# Altium PCB HV_DAC_1PPM.PcbDoc (part 1 of 5)
Units mm, origin at the board's own origin, x right, y up, seen from the top; angles counter-clockwise.
Board outline 148 x 86 mm, 6 copper layers (Layer 1, Layer 2, Layer 3, Layer 4, Layer 5, Layer 6), stack 1.615 mm thick; 392 components, 227 nets, 1037 pads, 645 vias.
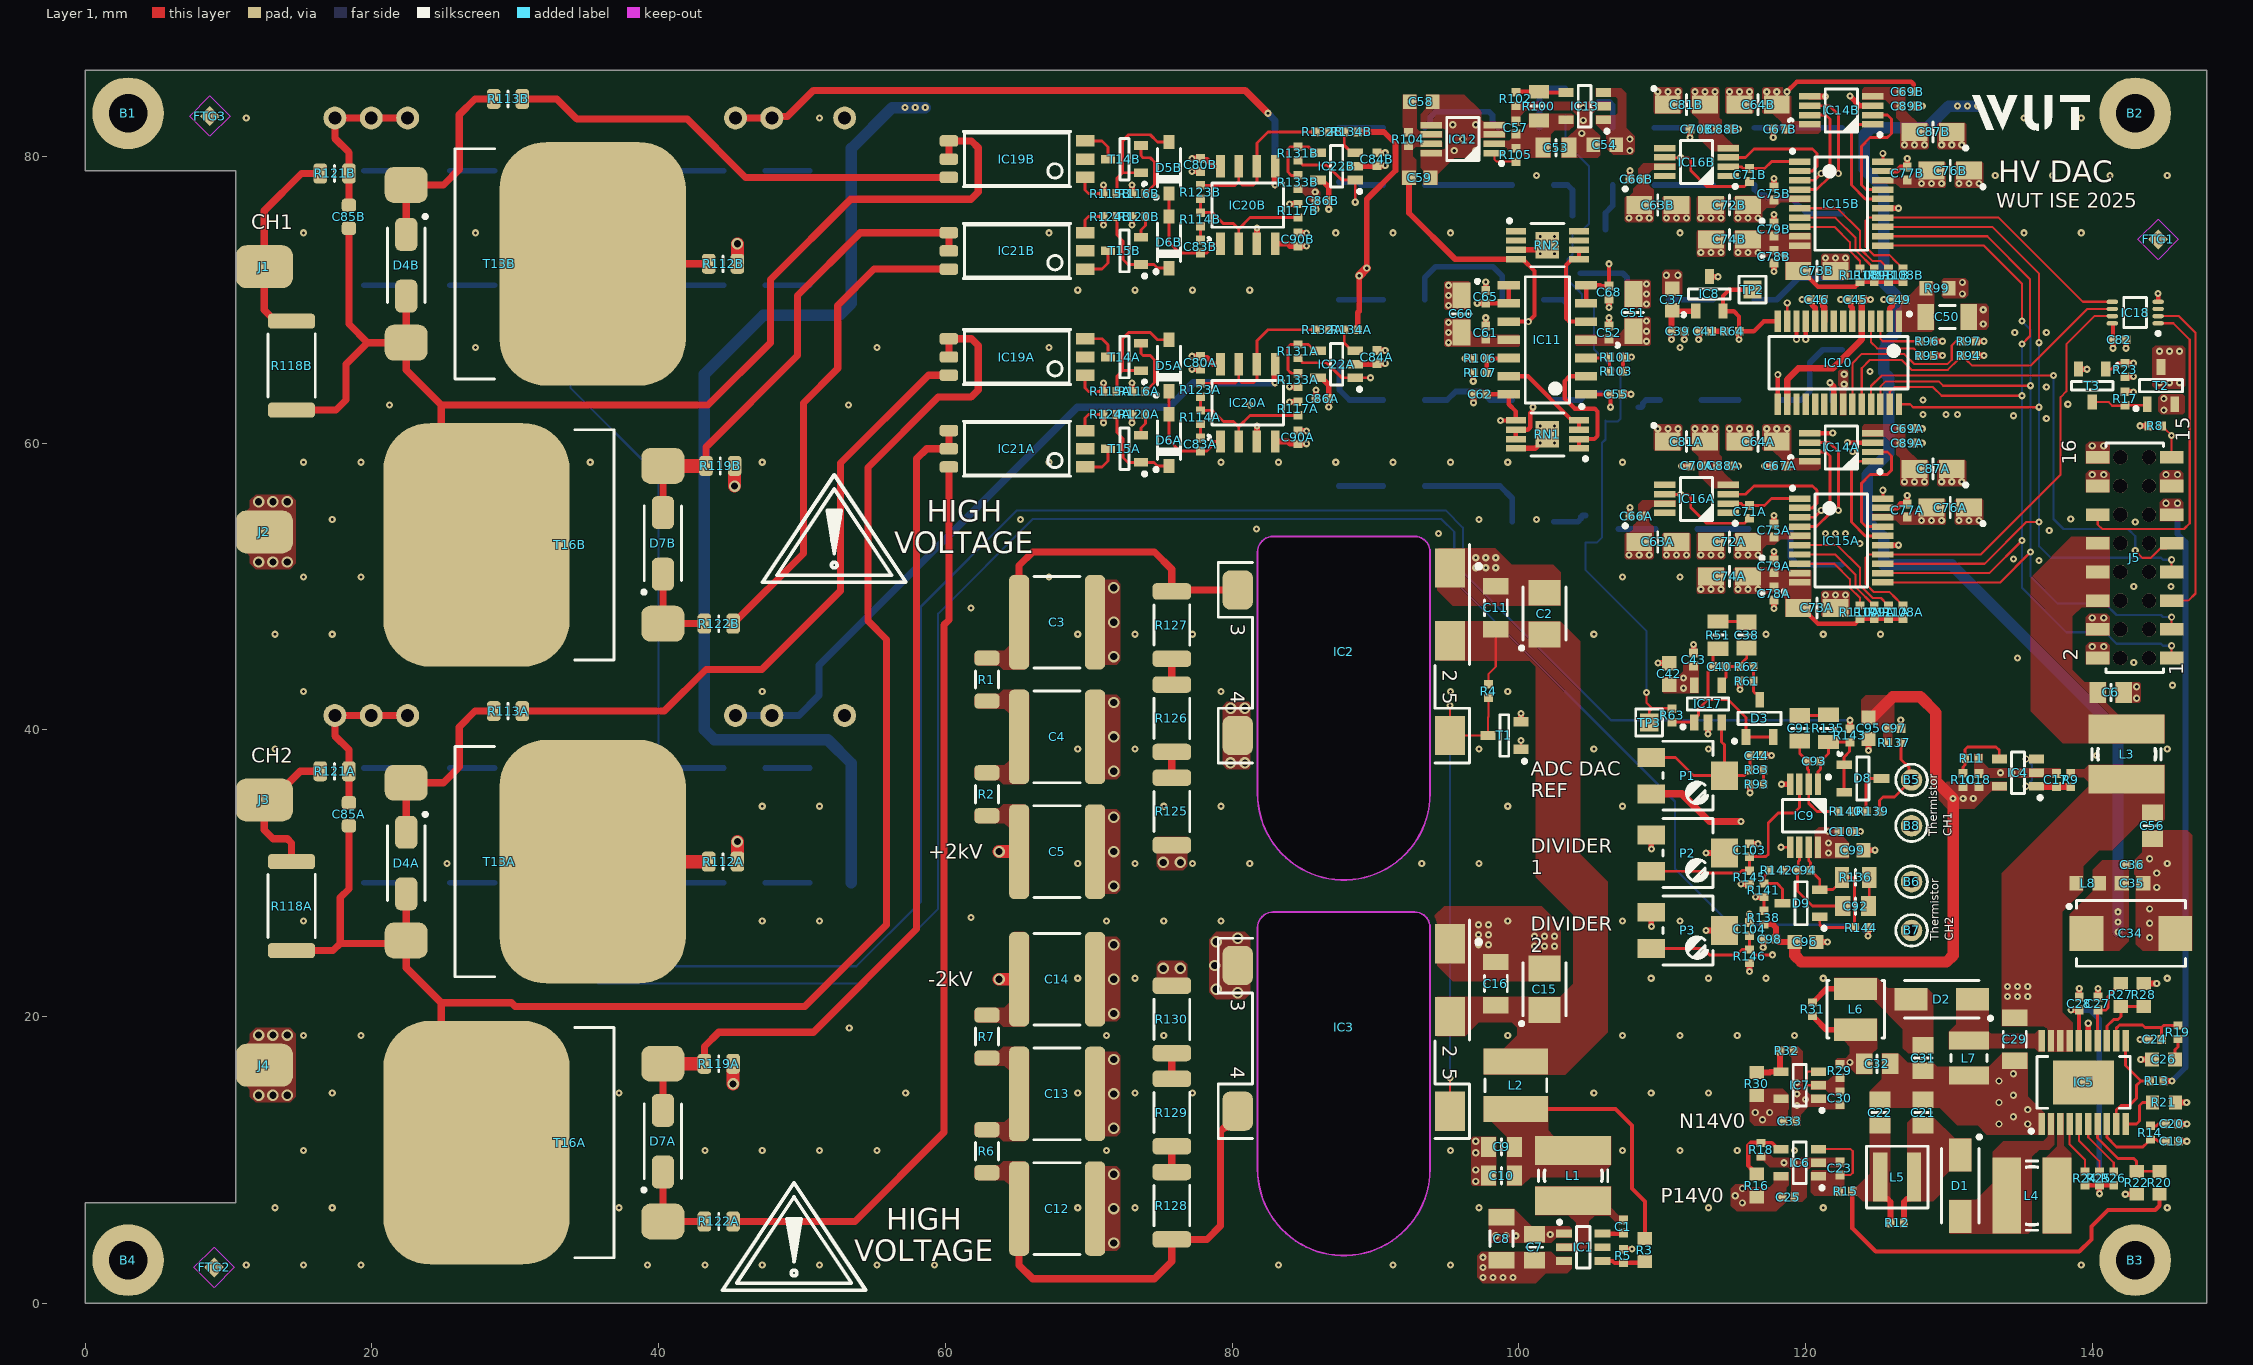
[diagram p0: Layer 1 view]
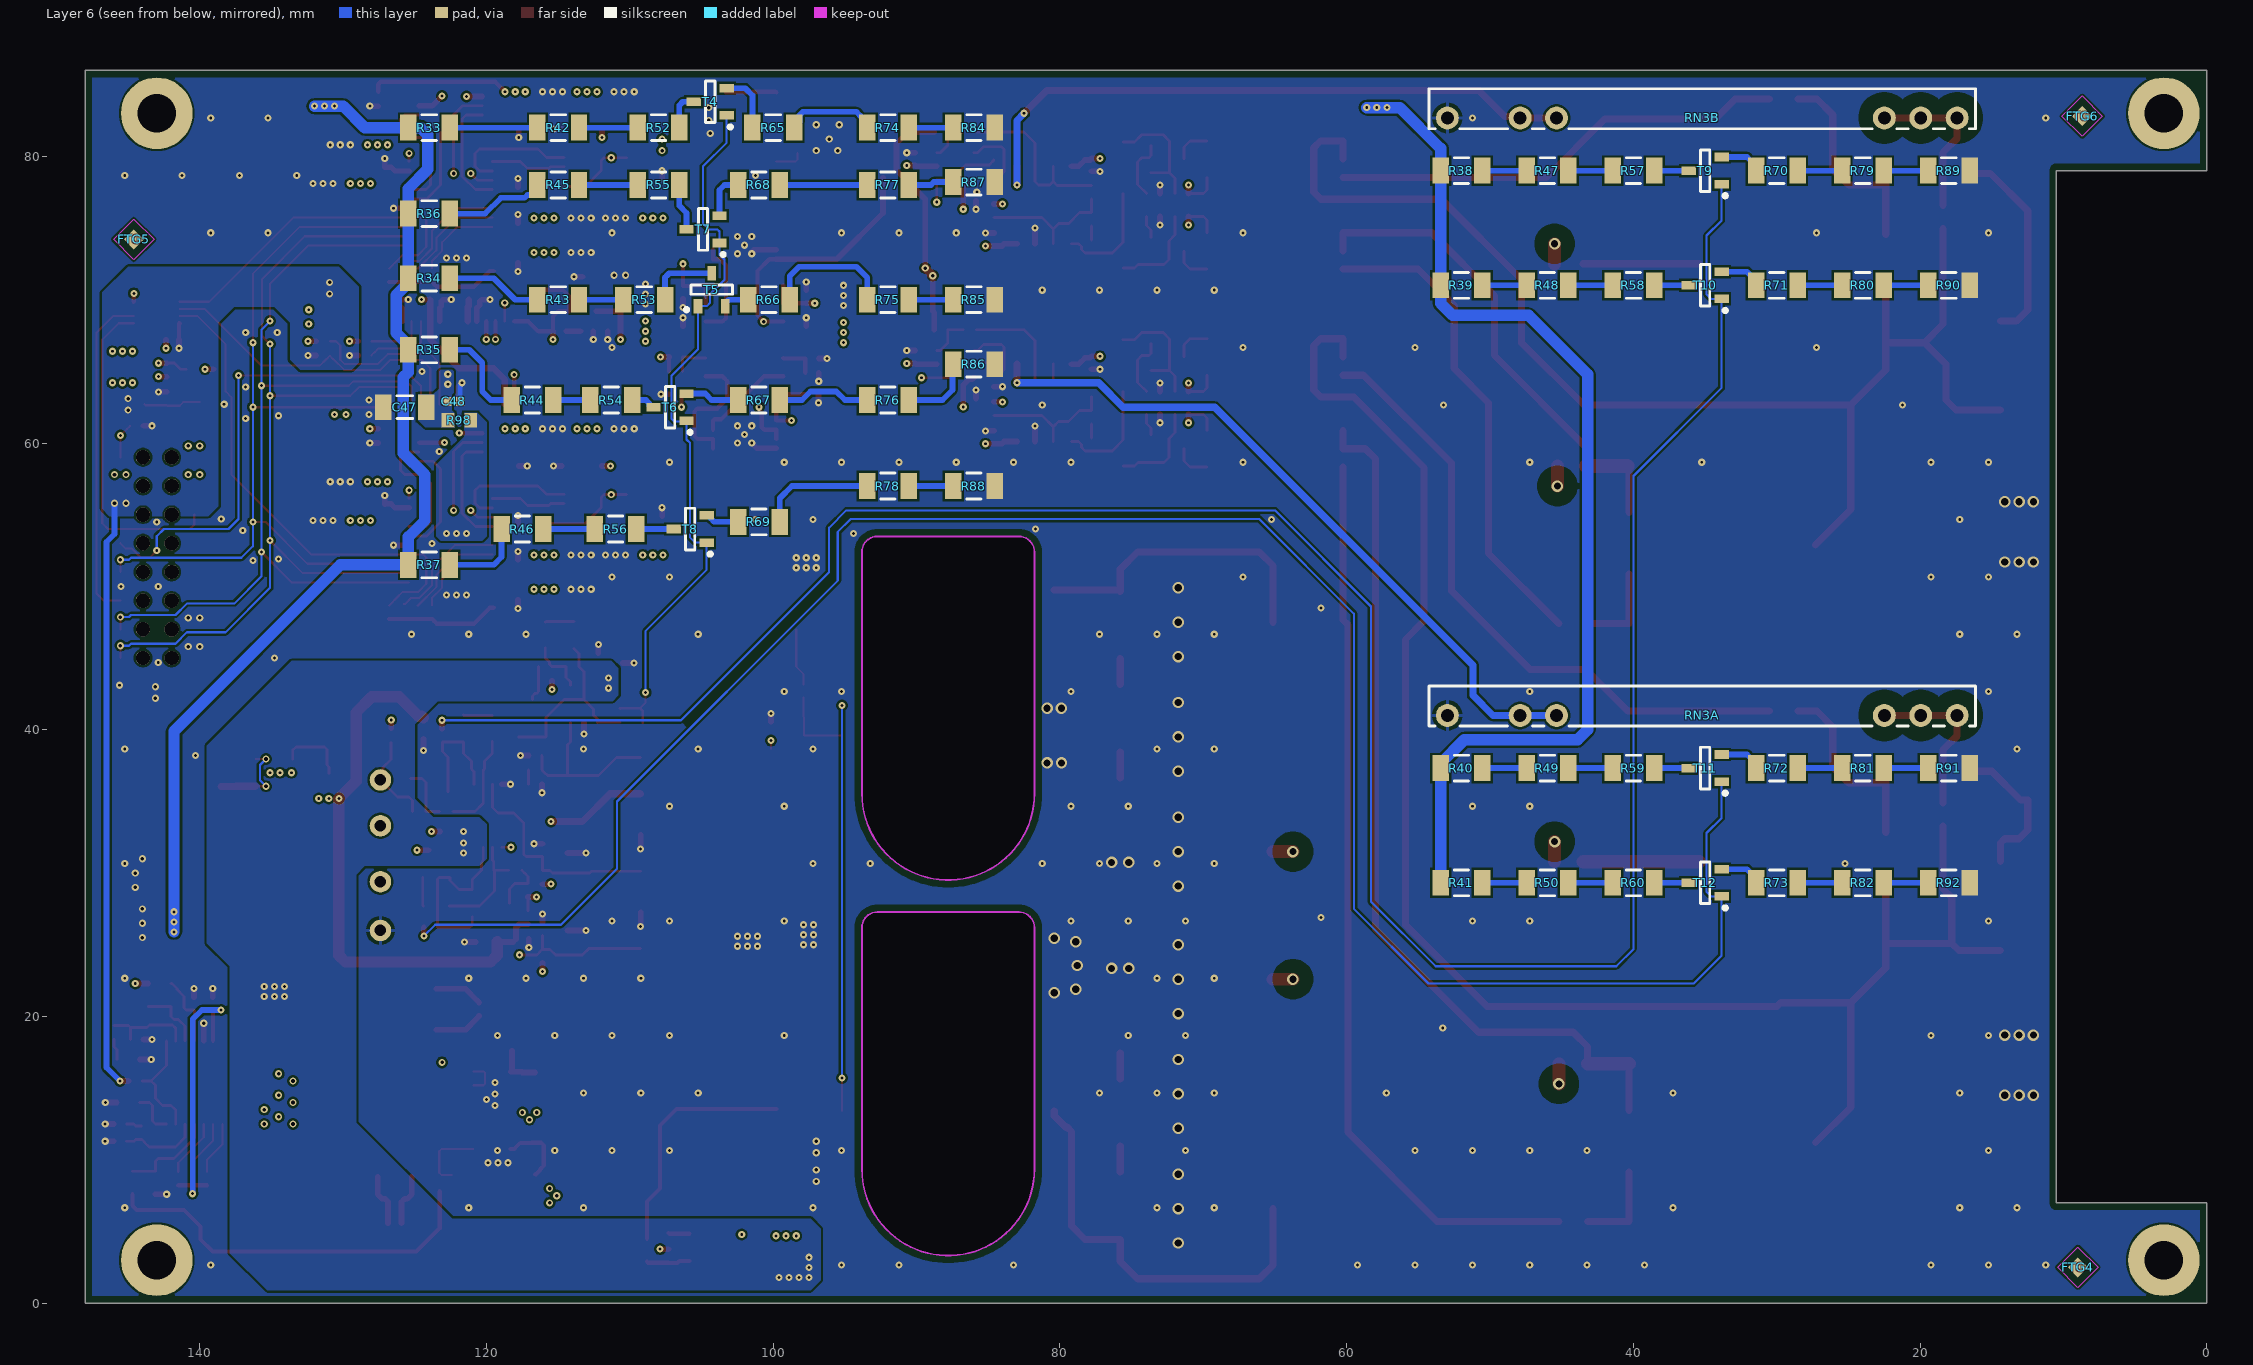
[diagram p1: Layer 6 view, seen from below]
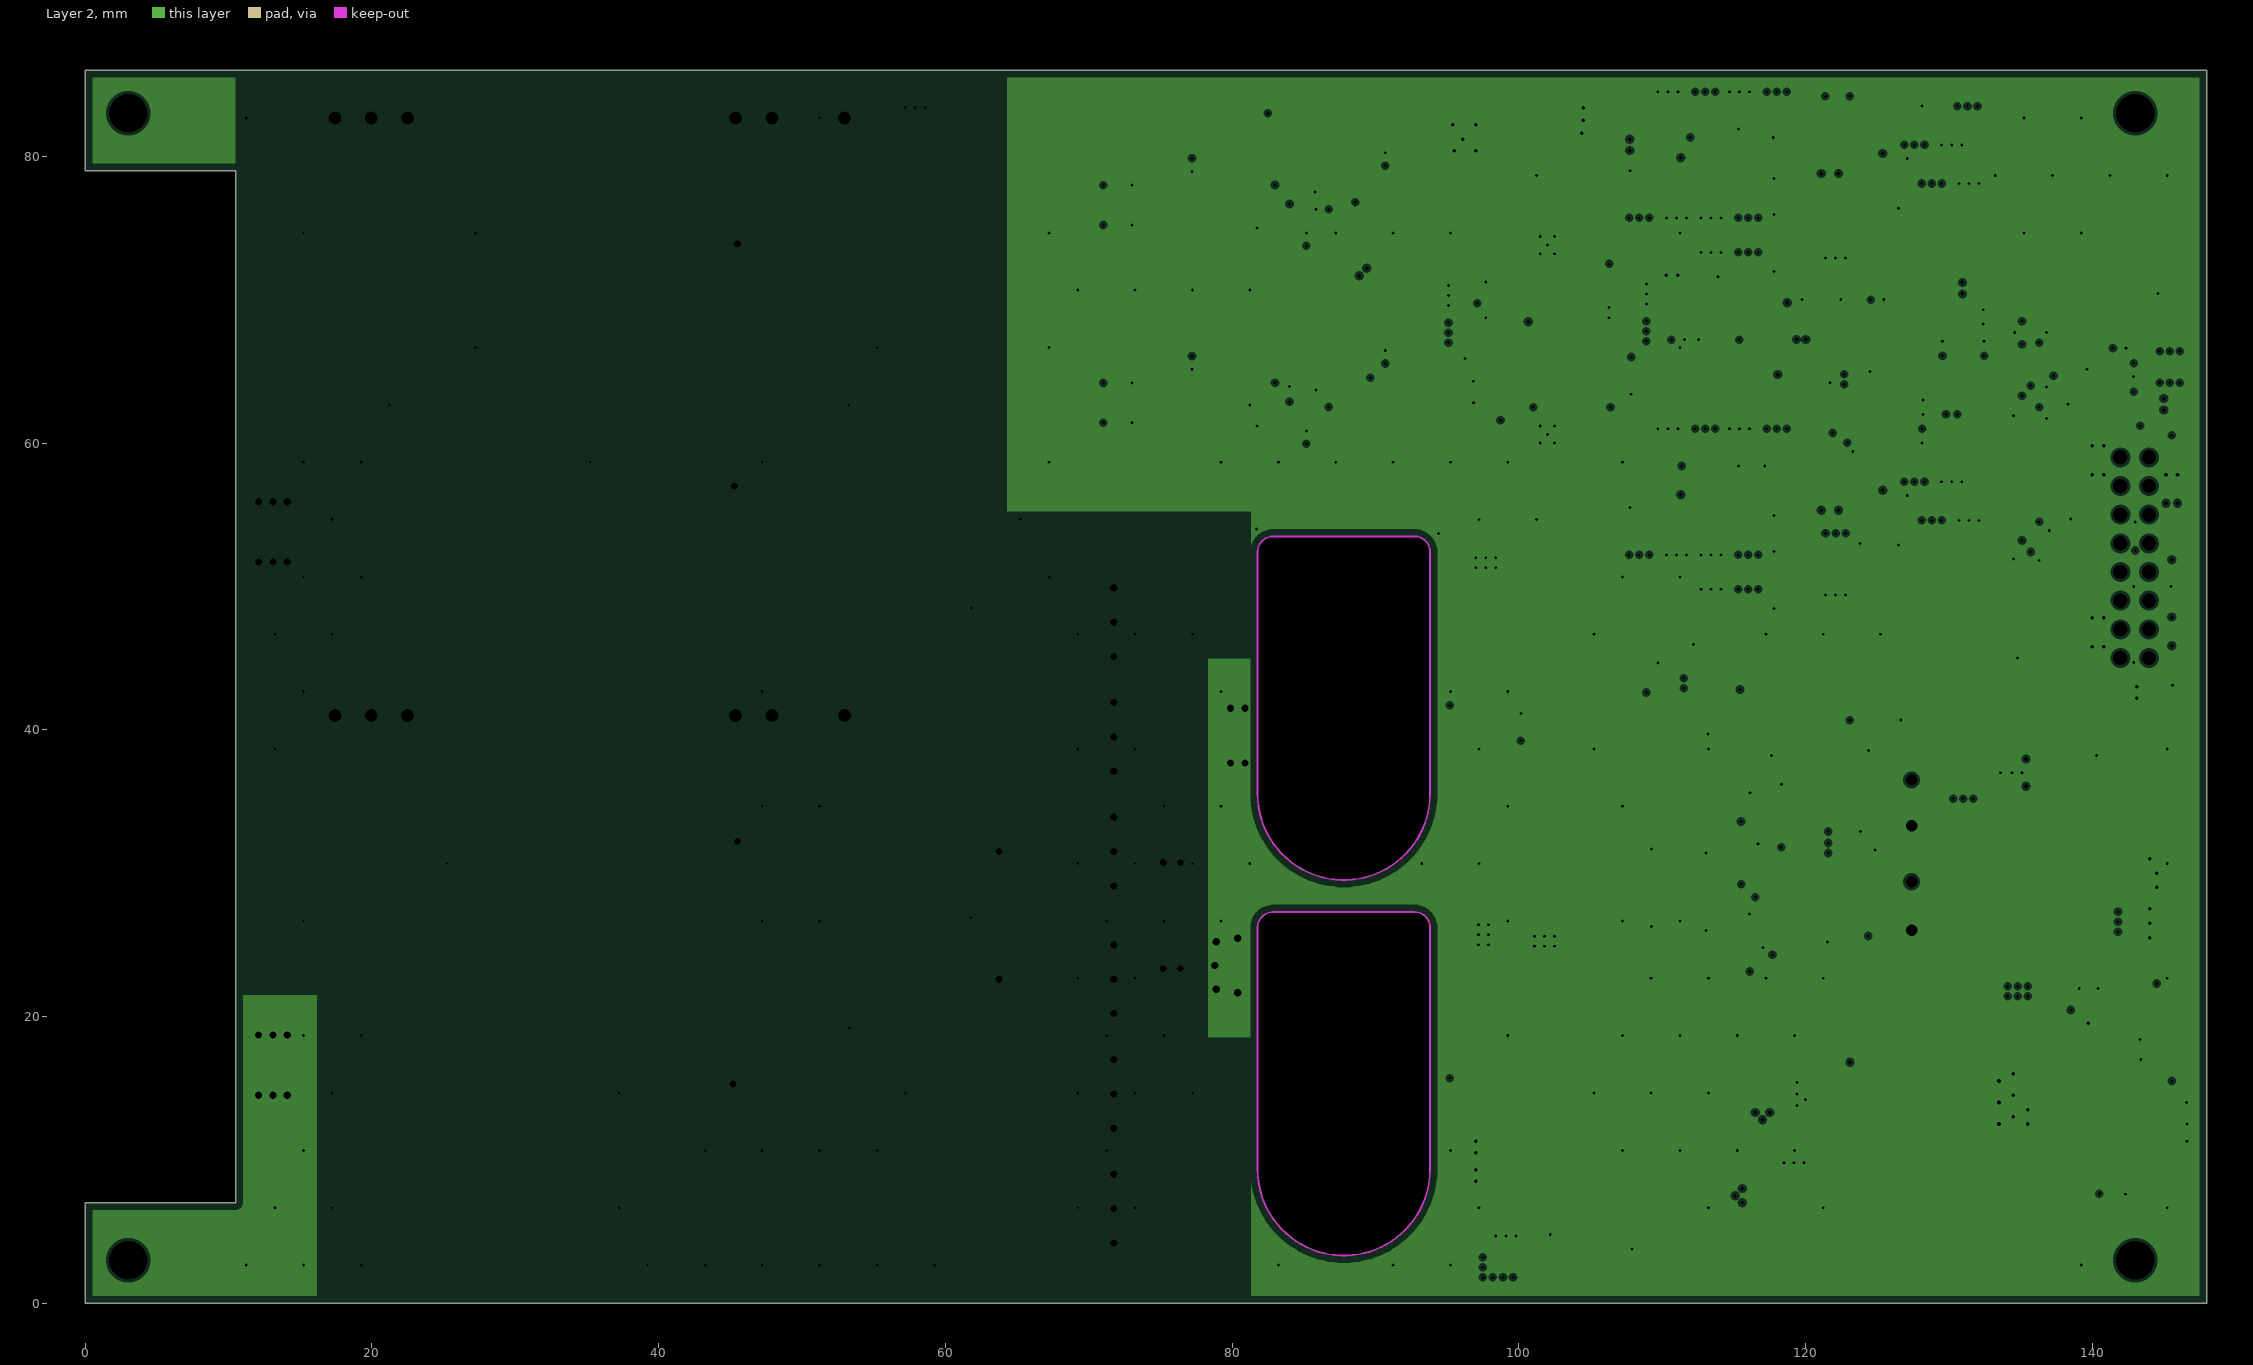
[diagram p2: Layer 2, clearances drawn from the general rule]
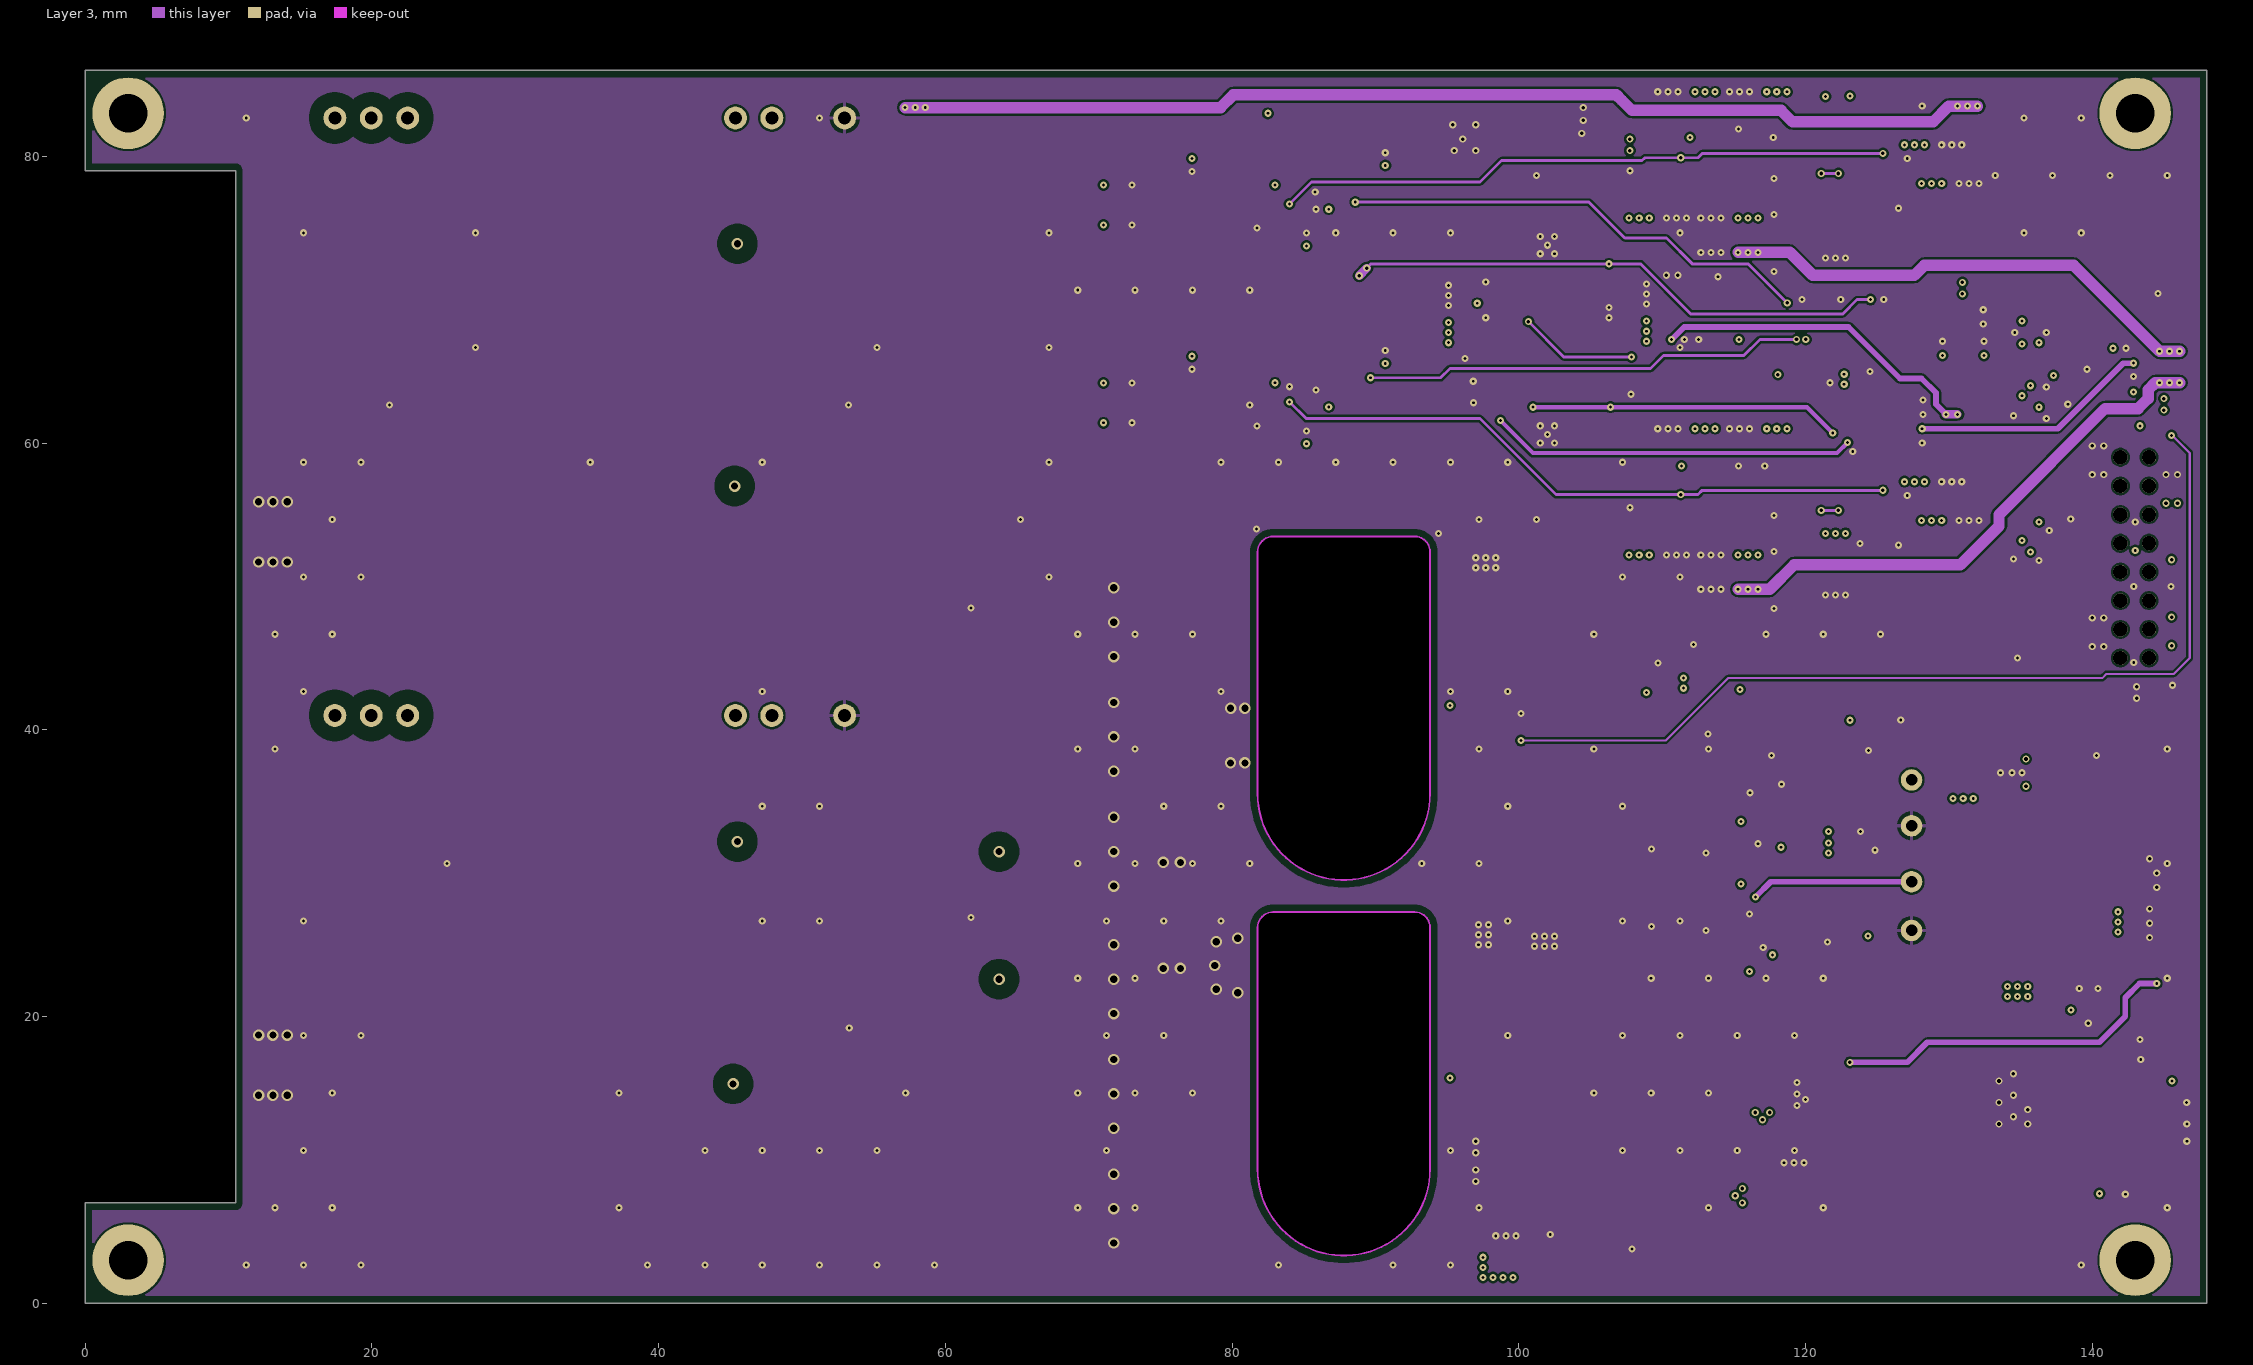
[diagram p3: Layer 3]
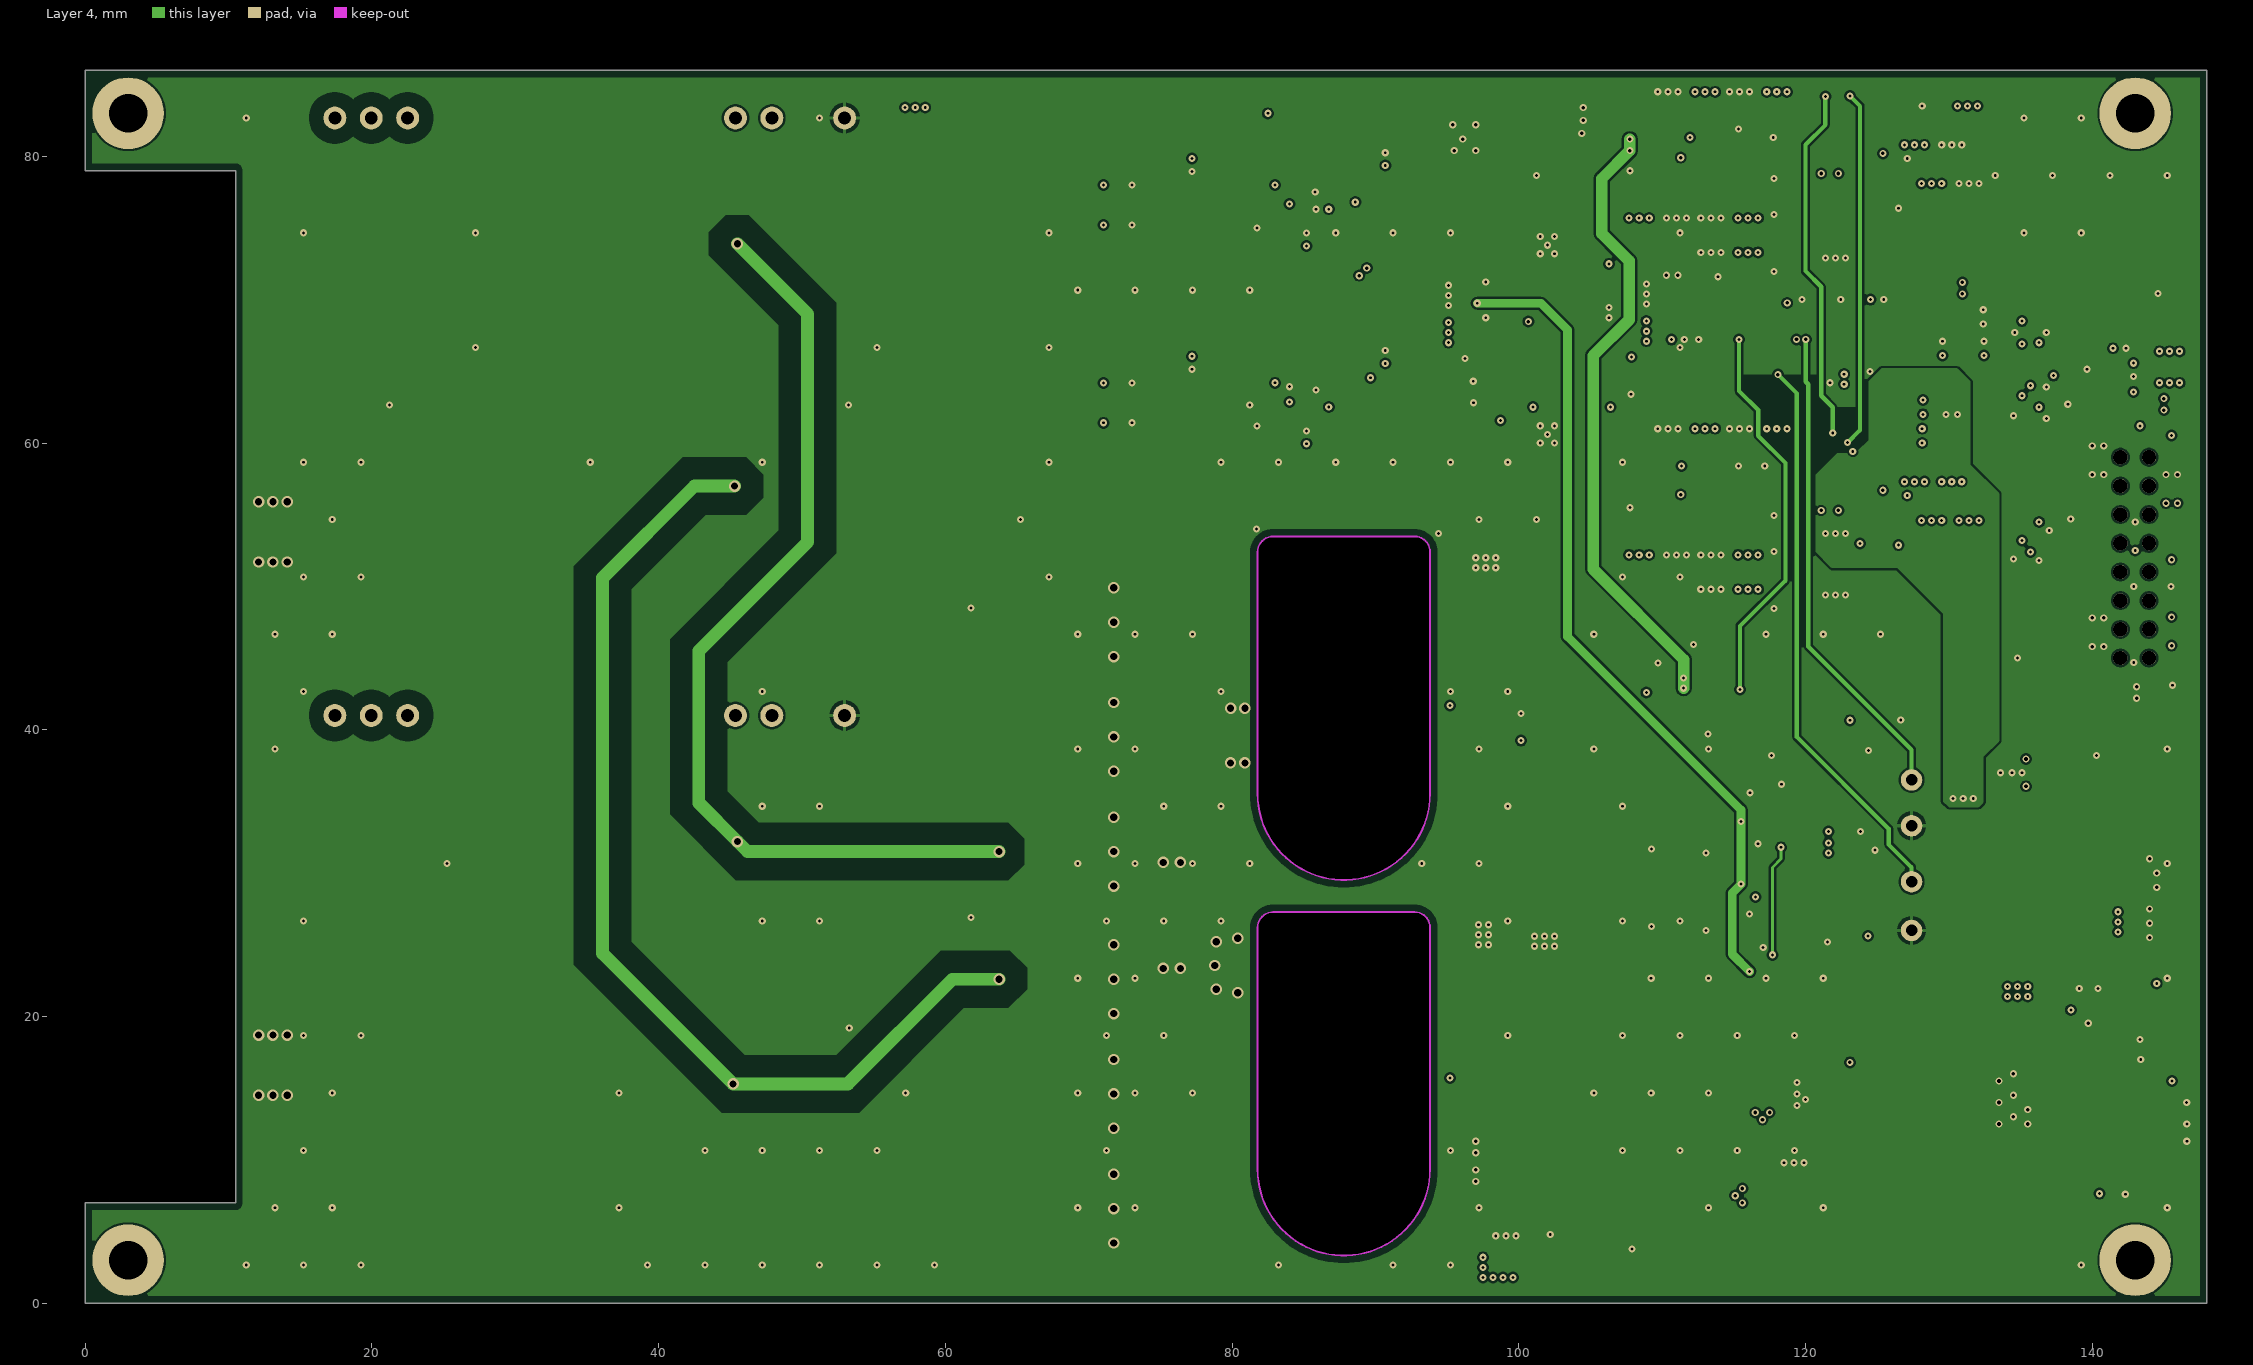
[diagram p4: Layer 4]
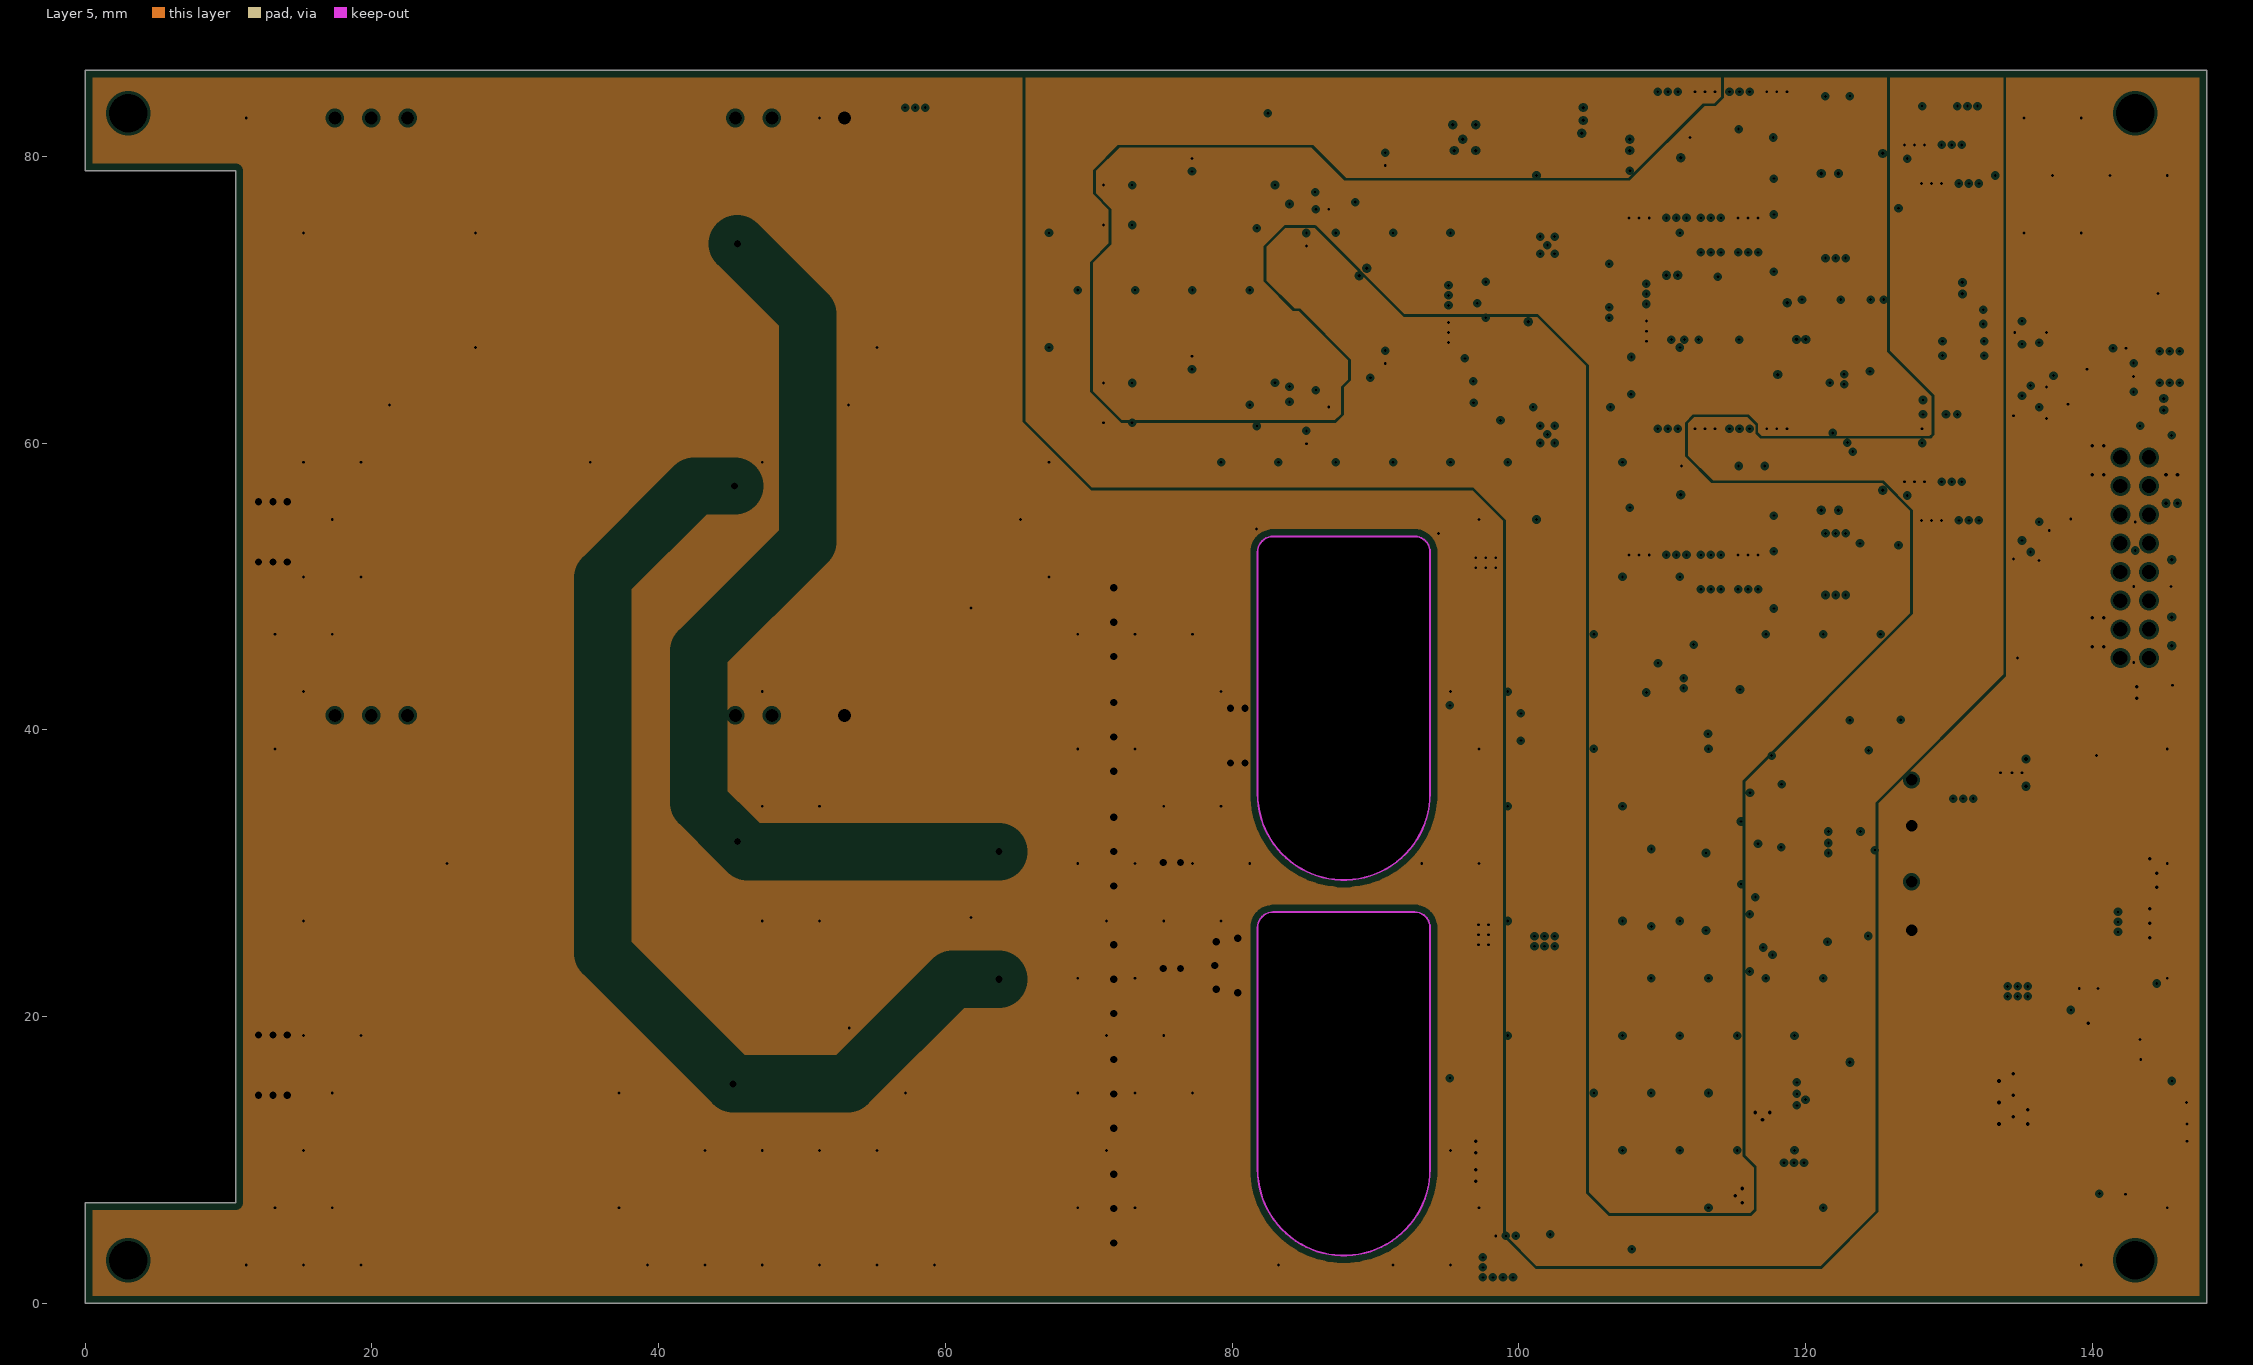
[diagram p5: Layer 5, clearances drawn from the general rule]
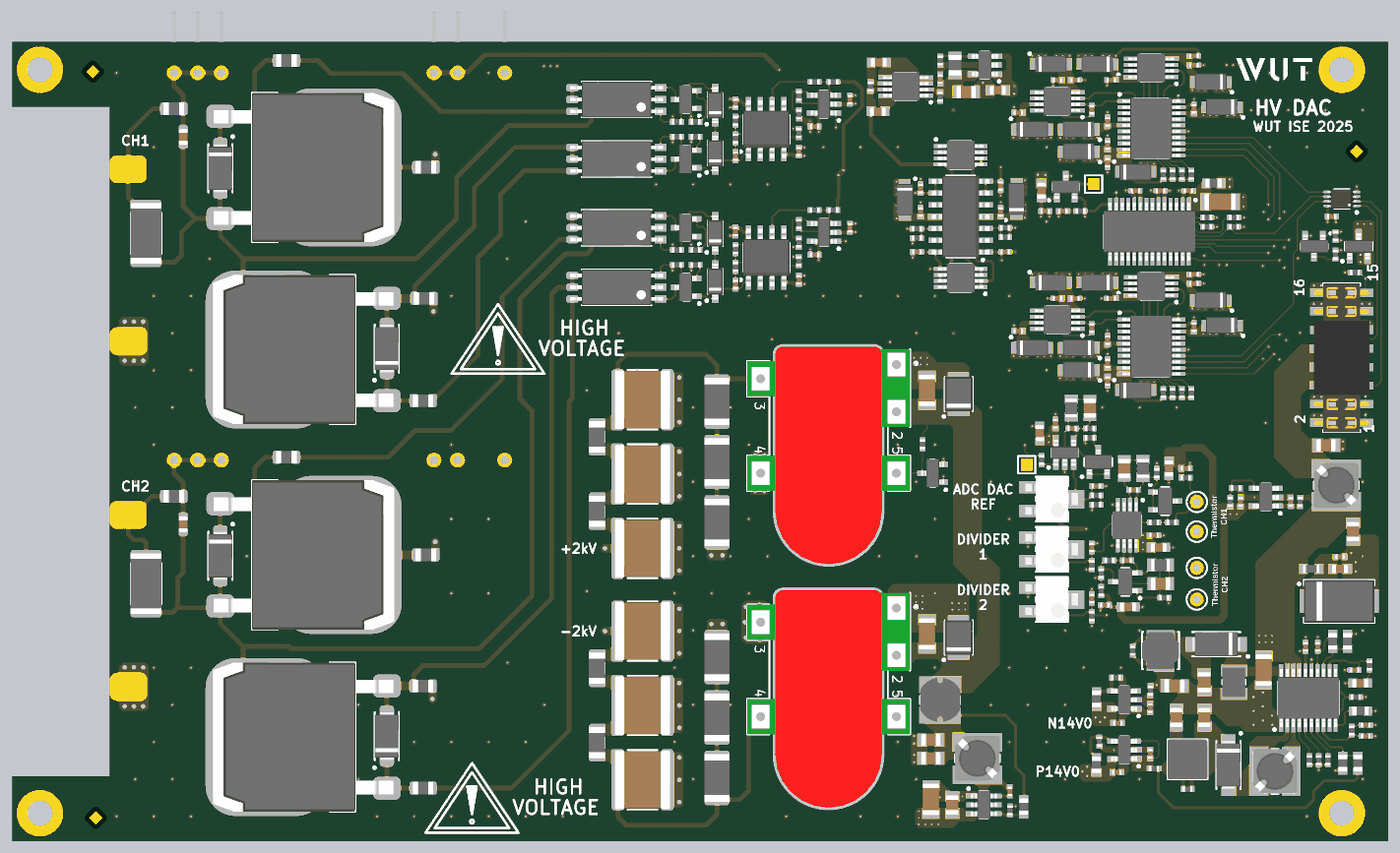
[diagram p8: 3D render of the assembled board from above, using the file's embedded part models]
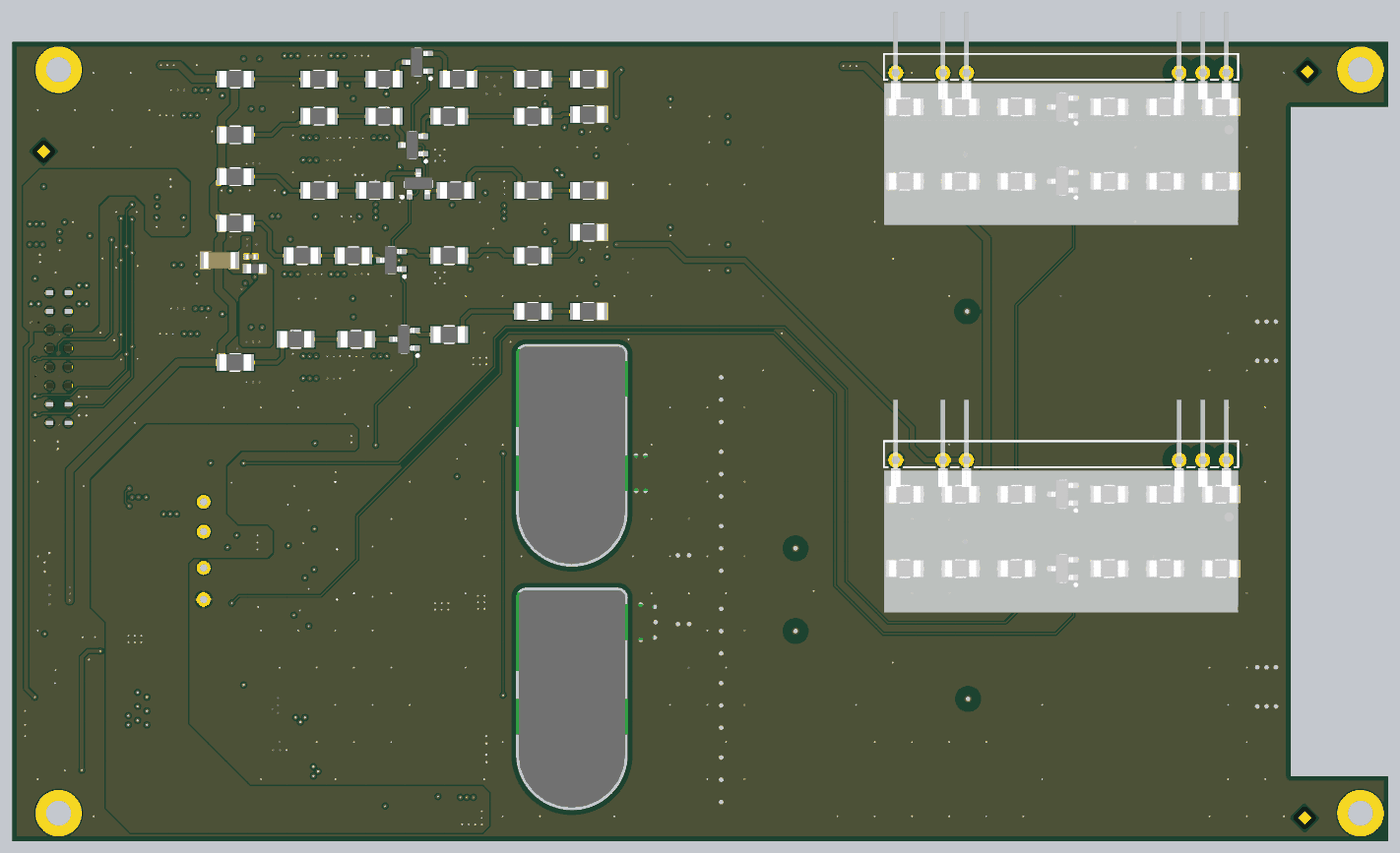
[diagram p9: 3D render of the assembled board from below, using the file's embedded part models]

## Layer stack, top to bottom
Top Solder: solder mask 0.0102, Solder Resist, Dk 3.5
Layer 1: signal copper 0.0356
Dielectric 1: prepreg 0.0764, 1080, Dk 4.1
Layer 2: plane copper 0.0175, net GND
Dielectric 2: core 0.1, Core, Dk 4.1
Layer 3: signal copper 0.0175
Dielectric 3: prepreg 0.2104, 7628, Dk 4.1
Dielectric 4: dielectric 0.7, FR-4, Dk 4.8
Dielectric 5: prepreg 0.2104, 7628, Dk 4.1
Layer 4: signal copper 0.0175
Dielectric 6: core 0.1, Core, Dk 4.1
Layer 5: plane copper 0.0175, net (Multiple Nets)
Dielectric 7: prepreg 0.0764, 1080, Dk 4.1
Layer 6: signal copper 0.0356
Bottom Solder: solder mask 0.0102, Solder Resist, Dk 3.5

## Board outline
0,0 0,7 10.5,7 10.5,79 0,79 0,86 148,86 148,0 146,0

## Design rules (kind name [scope] priority, off if disabled: settings)
BoardOutlineClearance [not (InComponent('J1') or InComponent('J2') or InComponent('J3') or InComponent('J4'))] p1: gap=0.254 ignorepadtopadclearanceinfootprint=FALSE except(0: Arc-SplitContinuation Track-SplitContinuation SMDPad-OutlineEdge SMDPad-SplitContinuation THPad-SplitContinuation Via-SplitContinuation Fill-SplitContinuation Poly-SplitContinuation Region-SplitContinuation Text-SplitContinuation; 0.5: Poly-OutlineEdge Poly-CutoutEdge)
Clearance Clearance_HV [InNetClass('HV') vs not (InNetClass('HV') or InComponent('IC2') or InComponent('IC3'))] p1: gap=1 ignorepadtopadclearanceinfootprint=TRUE
Clearance [All] p2: gap=0.15 ignorepadtopadclearanceinfootprint=FALSE
HoleSize [All] p1: absolutevalues=TRUE maxlimit=5 minlimit=0.025 maxpercent=80.000 minpercent=20.000
MinimumSolderMaskSliver [All] p1: minsoldermaskwidth=0.1
PlaneClearance [All] p1: clearance=0.2
PlaneConnect [All] p1: pad.planeconnectstyle=Relief pad.reliefexpansion=0.508 pad.reliefentries=4 pad.reliefconductorwidth=0.254 pad.reliefairgap=0.254 via.planeconnectstyle=Direct via.reliefexpansion=0.508 via.reliefentries=4 via.reliefconductorwidth=0.254 via.reliefairgap=0.254
PolygonConnect [All] p1: thpad.connectstyle=Relief thpad.reliefconductorwidth=0.254 thpad.reliefentries=4 thpad.polygonreliefangle="90 Angle" thpad.airgapwidth=0.254 smdpad.connectstyle=Direct smdpad.reliefconductorwidth=0.254 smdpad.reliefentries=4 smdpad.polygonreliefangle="90 Angle" smdpad.airgapwidth=0.254 via.connectstyle=Direct via.reliefconductorwidth=0.254 via.reliefentries=4 via.polygonreliefangle="90 Angle" via.airgapwidth=0.254
RoutingVias [All] p1: holewidth=0.2 width=0.5 viastyle="Through Hole" minholewidth=0.2 minwidth=0.5 maxholewidth=0.5 maxwidth=0.8
SilkToSilkClearance [All] p1: silktosilkclearance=0.2
SilkToSolderMaskClearance [IsPad] p1: minsilkscreentomaskgap=0.1 clearancetoexposedcopper=TRUE
SolderMaskExpansion [All] p1: expansion=0.05 istentingtop=FALSE
SupplyNets "Schematic Supply Nets_1" [InNet('P12V0_HEAT')] p1: voltage=0.000
SupplyNets "Schematic Supply Nets_11" [InNet('P14V0')] p2: voltage=0.000
SupplyNets "Schematic Supply Nets_17" [InNet('P5V0A')] p3: voltage=0.000
SupplyNets "Schematic Supply Nets_15" [InNet('N15V0')] p4: voltage=0.000
SupplyNets "Schematic Supply Nets_14" [InNet('P12V0')] p5: voltage=0.000
SupplyNets "Schematic Supply Nets_13" [InNet('P3V3')] p6: voltage=0.000
SupplyNets "Schematic Supply Nets_10" [InNet('GND')] p7: voltage=0.000
SupplyNets "Schematic Supply Nets_9" [InNet('N14V0')] p8: voltage=0.000
SupplyNets "Schematic Supply Nets_8" [InNet('N2kV0')] p9: voltage=0.000
SupplyNets "Schematic Supply Nets_7" [InNet('VREF_P5V0')] p10: voltage=0.000
SupplyNets "Schematic Supply Nets_6" [InNet('VREF_P2V5')] p11: voltage=0.000
SupplyNets "Schematic Supply Nets_5" [InNet('P3V3_DAC')] p12: voltage=0.000
SupplyNets "Schematic Supply Nets_4" [InNet('P12V0_IN')] p13: voltage=0.000
SupplyNets "Schematic Supply Nets_3" [InNet('P2kV0')] p14: voltage=0.000
SupplyNets "Schematic Supply Nets" [InNet('P15V0')] p15: voltage=0.000
Width [All] p1: maxlimit=5 minlimit=0.15 preferedwidth=0.15
24 further rules are at their usual default settings.

## Classes and differential pairs
channel class HV_Stage: U_HV_Stage1 U_HV_Stage2
channel class DAC: U_DAC1 U_DAC2
net class HV: HV_OUT_RA HV_OUT_RB HV_OUTA HV_OUTB N2kV0 NetC3_2 NetC4_2 NetC12_1 NetC13_1 NetC85A_1 NetC85B_1 NetD4A_1 NetD4B_1 NetD7A_1 NetD7A_2 NetD7B_1 NetD7B_2 NetIC19A_6 NetIC19B_6 NetIC21A_6 NetIC21B_6 NetR112A_1 NetR112B_1 P2kV0
component class U_HV_Stage2: C80B C83B C84B C85B C86B C90B D4B D5B D6B D7B IC19B IC20B IC21B IC22B R112B R113B R114B R115B R116B R117B R118B R119B R120B R121B R122B R123B R124B R131B R132B R133B R134B RN3B T13B T14B T15B T16B
component class U_HV_Stage1: C80A C83A C84A C85A C86A C90A D4A D5A D6A D7A IC19A IC20A IC21A IC22A R112A R113A R114A R115A R116A R117A R118A R119A R120A R121A R122A R123A R124A R131A R132A R133A R134A RN3A T13A T14A T15A T16A
component class U_DAC2: C63B C64B C66B C67B C69B C70B C71B C72B C73B C74B C75B C76B C77B C78B C79B C81B C87B C88B C89B IC14B IC15B IC16B R108B R109B R110B R111B
component class U_DAC1: C63A C64A C66A C67A C69A C70A C71A C72A C73A C74A C75A C76A C77A C78A C79A C81A C87A C88A C89A IC14A IC15A IC16A R108A R109A R110A R111A
component class U_Reference: C51 C52 C53 C54 C55 C57 C58 C59 C60 C61 C62 C65 C68 IC11 IC12 IC13 R100 R101 R102 R103 R104 R105 R106 R107 RN1 RN2
component class U_Power_Supply: C1 C2 C3 C4 C5 C6 C7 C8 C9 C10 C11 C12 C13 C14 C15 C16 C17 C18 C19 C20 C21 C22 C23 C24 C25 C26 C27 C28 C29 C30 C31 C32 C33 C56 D1 D2 IC1 IC2 IC3 IC4 IC5 IC6 IC7 L1 L2 L3 L4 L5 L6 L7 R1 R2 R3 R4 R5 R6 R7 R8 R9 R10 R11 R12 R13 R14 R15 R16 R17 R18 R19 R20 R21 R22 R23 R24 R25 R26 R27 R28 R29 R30 R31 R32 R125 R126 R127 R128 R129 R130 T1 T2 T3
component class U_Heater: B5 B6 B7 B8 C34 C35 C36 C37 C38 C39 C40 C41 C42 C43 C44 C91 C92 C93 C94 C95 C96 C97 C98 C99 C101 C103 C104 D3 D8 D9 IC8 IC9 IC17 L8 P1 P2 P3 R33 R34 R35 R36 R37 R38 R39 R40 R41 R42 R43 R44 R45 R46 R47 R48 R49 R50 R51 R52 R53 R54 R55 R56 R57 R58 R59 R60 R61 R62 R63 R64 R65 R66 R67 R68 R69 R70 R71 R72 R73 R74 R75 R76 R77 R78 R79 R80 R81 R82 R83 R84 R85 R86 R87 R88 R89 R90 R91 R92 R93 R135 R136 R137 R138 R139 R140 R141 R142 R143 R144 R145 R146 T4 T5 T6 T7 T8 T9 T10 T11 T12 TP2 TP3
component class U_ADC: C45 C46 C47 C48 C49 C50 IC10 R94 R95 R96 R97 R98 R99
component class HV_DAC_1PPM: B1 B2 B3 B4 C82 FTG1 FTG2 FTG3 FTG4 FTG5 FTG6 IC18 J1 J2 J3 J4 J5

## Components (designator, comment, footprint, x,y, rotation, side; value= is the part's Value field where it differs from the comment)
B1 "Plated Hole" MTG270_500 3,83 r0 top locked
B2 "Plated Hole" MTG270_500 143,83 r0 top locked
B3 "Plated Hole" MTG270_500 143,3 r0 top locked
B4 "Plated Hole" MTG270_500 3,3 r0 top locked
B5 "Plated Hole" c150h80 127.4,36.5 r90 top
B6 "Plated Hole" c150h80 127.4,29.4 r90 top
B7 "Plated Hole" c150h80 127.4,26 r90 top
B8 "Plated Hole" c150h80 127.4,33.3 r90 top
C1 "100nF" CAPC1005X55N 107.3,5.35 r90 top
C2 "22uF" CAPMP3528X210N 101.8,48.1 r90 top
C3 "22nF" CAPC5764X279N 67.8,47.5 r180 top
C4 "22nF" CAPC5764X279N 67.8,39.5 r180 top
C5 "22nF" CAPC5764X279N 67.8,31.5 r180 top
C6 "4.7uF" CAPC2012X145N 141.3,42.6 r180 top
C7 "4.7uF" CAPC2012X145N 101.1,3.9 r270 top
C8 "22uF" CAPC3216X180N 98.8,4.5 r270 top
C9 "22uF" CAPC2012X135N 98.8,10.9 r0 top
C10 "22uF" CAPC2012X135N 98.8,8.9 r0 top
C11 "22uF" CAPC3216X180N 98.4,48.5 r270 top
C12 "22nF" CAPC5764X279N 67.8,6.6 r0 top
C13 "22nF" CAPC5764X279N 67.8,14.6 r0 top
C14 "22nF" CAPC5764X279N 67.8,22.6 r0 top
C15 "22uF" CAPMP3528X210N 101.8,21.9 r90 top
C16 "22uF" CAPC3216X180N 98.4,22.3 r270 top
C17 "2.2uF" CAPC1005X55N 137.5,36.5 r270 top
C18 "2.2uF" CAPC1005X55N 132.1,36.5 r270 top
C19 "27pF" CAPC1005X55N 145.56,11.3 r180 top
C20 "22nF" CAPC1005X55N 145.56,12.5 r180 top
C21 "4.7uF" CAPC2012X145N 128.2,13.3 r270 top
C22 "4.7uF" CAPC2012X145N 125.2,13.3 r270 top
C23 "2.2uF" CAPC1005X55N 122.4,9.4 r270 top
C24 "22pF" CAPC1005X55N 144.375,18.4 r0 top
C25 "2.2uF" CAPC1005X55N 118.8,7.4 r180 top
C26 "82nF" CAPC1608X87N#1 144.975,17 r0 top
C27 "1uF" CAPC1005X55N 140.4,20.9 r90 top
C28 "1uF" CAPC1005X55N 139.1,20.9 r270 top
C29 "22uF" CAPC3216X180N 134.6,18.4 r90 top
C30 "2.2uF" CAPC1005X55N 122.4,14.3 r90 top
C31 "2.2uF" CAPC2013X145N 128.2,17.1 r90 top
C32 "2.2uF" CAPC2013X145N 125,16.7 r180 top
C33 "2.2uF" CAPC1005X55N 118.9,12.7 r180 top
C34 "100uF" CAPMP7343X310N 142.7,25.8 r0 top
C35 "10uF" CAPC1608X80N 142.8,29.3 r180 top
C36 "100nF" CAPC1005X55N 142.8,30.6 r180 top
C37 "10uF" CAPC1608X80N 110.7,70 r270 top
C38 "22uF" CAPC2012X135N 115.9,46.6 r90 top
C39 "100nF" CAPC1005X55N 111.1,67.8 r180 top
C40 "100pF" CAPC1005X55N 114,44.4 r180 top
C41 "1uF" CAPC1005X55N 113,67.8 r0 top
C42 "10uF" CAPC1608X80N 110.5,43.9 r270 top
C43 "100nF" CAPC1005X55N 112.2,44.9 r270 top
C44 "100nF" CAPC1005X55N 116.6,38.2 r180 top
C45 "1uF" CAPC1005X55N 123.5,70 r0 top
C46 "1uF" CAPC1005X55N 120.8,70 r0 top
C47 "22uF" CAPC3216X180N 125.7,62.5 r180 bottom
C48 "100nF" CAPC1005X55N 122.3,62.9 r0 bottom
C49 "100nF" CAPC1005X55N 126.5,70 r0 top
C50 "22uF" CAPC3216X180N 129.9,68.8 r180 top
C51 "10uF" CAPMP3216X180N 108,69.1 r90 top
C52 "100nF" CAPC1005X55N 106.3,67.7 r270 top
C53 "2.2uF" CAPC2012X135N 102.6,80.6 r180 top
C54 "1uF" CAPC1608X87N#1 106,80.8 r0 top
C55 "1uF" CAPC1005X55N 106.8,63.4 r180 top
C56 "4.7uF" CAPC2012X145N 144.2,33.3 r90 top
C57 "100nF" CAPC1005X55N 99.8,82 r270 top
C58 "1uF" CAPC1608X87N#1 93.2,83.8 r180 top
C59 "10uF" CAPC1608X80N 93.1,78.5 r180 top
C60 "10uF" CAPMP3216X180N 96,69 r270 top
C61 "100nF" CAPC1005X55N 97.7,67.7 r270 top
C62 "1uF" CAPC1005X55N 97.3,63.4 r0 top
C63A "10uF" CAPMP3216X180N 109.7,53.1 r0 top (schematic designator C63)
C63B "10uF" CAPMP3216X180N 109.7,76.6 r0 top (schematic designator C63)
C64A "10uF" CAPMP3216X180N 116.7,60.1 r180 top (schematic designator C64)
C64B "10uF" CAPMP3216X180N 116.7,83.6 r180 top (schematic designator C64)
C65 "1uF" CAPC1005X55N 97.7,70.2 r270 top
C66A "100nF" CAPC1005X55N 108.2,54.9 r0 top (schematic designator C66)
C66B "100nF" CAPC1005X55N 108.2,78.4 r0 top (schematic designator C66)
C67A "100nF" CAPC1005X55N 118.2,58.4 r0 top (schematic designator C67)
C67B "100nF" CAPC1005X55N 118.2,81.9 r0 top (schematic designator C67)
C68 "1uF" CAPC1005X55N 106.3,70.5 r90 top
C69A "100nF" CAPC1005X55N 127.1,61 r0 top (schematic designator C69)
C69B "100nF" CAPC1005X55N 127.1,84.5 r0 top (schematic designator C69)
C70A "100nF" CAPC1005X55N 112.4,58.4 r180 top (schematic designator C70)
C70B "100nF" CAPC1005X55N 112.4,81.9 r180 top (schematic designator C70)
C71A "10pF" CAPC1005X55N 116.1,55.2 r270 top (schematic designator C71)
C71B "10pF" CAPC1005X55N 116.1,78.7 r270 top (schematic designator C71)
C72A "10uF" CAPMP3216X180N 114.7,53.1 r180 top (schematic designator C72)
C72B "10uF" CAPMP3216X180N 114.7,76.6 r180 top (schematic designator C72)
C73A "10uF" CAPMP3216X180N 120.8,48.5 r0 top (schematic designator C73)
C73B "10uF" CAPMP3216X180N 120.8,72 r0 top (schematic designator C73)
C74A "10uF" CAPMP3216X180N 114.7,50.7 r180 top (schematic designator C74)
C74B "10uF" CAPMP3216X180N 114.7,74.2 r180 top (schematic designator C74)
C75A "100nF" CAPC1005X55N 117.8,53.9 r270 top (schematic designator C75)
C75B "100nF" CAPC1005X55N 117.8,77.4 r270 top (schematic designator C75)
C76A "10uF" CAPMP3216X180N 130.1,55.5 r180 top (schematic designator C76)
C76B "10uF" CAPMP3216X180N 130.1,79 r180 top (schematic designator C76)
C77A "100nF" CAPC1005X55N 127.1,55.3 r270 top (schematic designator C77)
C77B "100nF" CAPC1005X55N 127.1,78.8 r270 top (schematic designator C77)
C78A "100nF" CAPC1005X55N 117.8,49.5 r90 top (schematic designator C78)
C78B "100nF" CAPC1005X55N 117.8,73 r90 top (schematic designator C78)
C79A "100nF" CAPC1005X55N 117.8,51.4 r270 top (schematic designator C79)
C79B "100nF" CAPC1005X55N 117.8,74.9 r270 top (schematic designator C79)
C80A "100nF" CAPC1005X55N 77.8,65.6 r90 top (schematic designator C80)
C80B "100nF" CAPC1005X55N 77.8,79.4 r90 top (schematic designator C80)
C81A "10uF" CAPMP3216X180N 111.7,60.1 r0 top (schematic designator C81)
C81B "10uF" CAPMP3216X180N 111.7,83.6 r0 top (schematic designator C81)
C82 "100nF" CAPC1005X55N 141.9,67.2 r180 top
C83A "22nF" CAPC1005X55N 77.8,59.9 r90 top (schematic designator C83)
C83B "22nF" CAPC1005X55N 77.8,73.7 r90 top (schematic designator C83)
C84A "100nF" CAPC1005X55N 90.1,66 r270 top (schematic designator C84)
C84B "100nF" CAPC1005X55N 90.1,79.8 r270 top (schematic designator C84)
C85A "3.3nF" CAPC1608X87N#2 18.4,34.1 r270 top (schematic designator C85)
C85B "3.3nF" CAPC1608X87N#2 18.4,75.775 r270 top (schematic designator C85)
C86A "100nF" CAPC1005X55N 86.3,63.1 r0 top (schematic designator C86)
C86B "100nF" CAPC1005X55N 86.3,76.9 r0 top (schematic designator C86)
C87A "10uF" CAPMP3216X180N 128.9,58.2 r180 top (schematic designator C87)
C87B "10uF" CAPMP3216X180N 128.9,81.7 r180 top (schematic designator C87)
C88A "100nF" CAPC1005X55N 114.3,58.4 r0 top (schematic designator C88)
C88B "100nF" CAPC1005X55N 114.3,81.9 r0 top (schematic designator C88)
C89A "100nF" CAPC1005X55N 127.1,60 r0 top (schematic designator C89)
C89B "100nF" CAPC1005X55N 127.1,83.5 r0 top (schematic designator C89)
C90A "100nF" CAPC1005X55N 84.6,60.4 r270 top (schematic designator C90)
C90B "100nF" CAPC1005X55N 84.6,74.2 r270 top (schematic designator C90)
C91 "22uF" CAPC2012X135N 119.6,40.1 r90 top
C92 "22uF" CAPC2012X135N 123.5,27.7 r0 top
C93 "100pF" CAPC1005X55N 120.6,37.8 r0 top
C94 "100pF" CAPC1005X55N 119.9,30.2 r0 top
C95 "10uF" CAPC1608X80N 124.4,40.1 r90 top
C96 "10uF" CAPC1608X80N 120,25.2 r180 top
C97 "100nF" CAPC1005X55N 126.2,40.1 r180 top
C98 "100nF" CAPC1005X55N 117.5,25.4 r0 top
C99 "10uF" CAPC1608X80N 123.3,31.6 r180 top
C101 "100nF" CAPC1005X55N 122.8,32.9 r180 top
C103 "100nF" CAPC1005X55N 116.1,31.6 r270 top
C104 "100nF" CAPC1005X55N 116.1,26.1 r270 top
D1 "MBRA340T3G" DIOM5226X220N#1 130.8,8.2 r270 top
D2 "MBRA340T3G" DIOM5226X220N#1 129.5,21.2 r180 top
D3 "DZ3X062D0L" SOT95P275X140-3N 116.8,40.8 r90 top
D4A "1SMA5931BT3G" DIOM5226X220N#2 22.4,30.7 r270 top (schematic designator D4)
D4B "1SMA5931BT3G" DIOM5226X220N#2 22.4,72.4 r270 top (schematic designator D4)
D5A "1N4448W" SOD3715X135N 75.6,65.4 r90 top (schematic designator D5)
D5B "1N4448W" SOD3715X135N 75.6,79.2 r90 top (schematic designator D5)
D6A "1N4448W" SOD3715X135N 75.6,60.2 r90 top (schematic designator D6)
D6B "1N4448W" SOD3715X135N 75.6,74 r90 top (schematic designator D6)
D7A "1SMA5931BT3G" DIOM5226X220N#2 40.3,11.3 r90 top (schematic designator D7)
D7B "1SMA5931BT3G" DIOM5226X220N#2 40.3,53 r90 top (schematic designator D7)
D8 "DZ3X062D0L" SOT95P275X140-3N 124,36.6 r0 top
D9 "DZ3X062D0L" SOT95P275X140-3N 119.7,27.9 r180 top
FTG1 "Use only in PCB" FIDUCIAL_TOP_S100-200 144.6,74.2 r90 top
FTG2 "Use only in PCB" FIDUCIAL_TOP_S100-200 9,2.5 r90 top
FTG3 "Use only in PCB" FIDUCIAL_TOP_S100-200 8.7,82.8 r90 top
FTG4 "Use only in PCB" FIDUCIAL_TOP_S100-200 9,2.5 r90 bottom
FTG5 "Use only in PCB" FIDUCIAL_TOP_S100-200 144.6,74.2 r90 bottom
FTG6 "Use only in PCB" FIDUCIAL_TOP_S100-200 8.7,82.8 r90 bottom
IC1 "AP62201WU-7" SOT95P280X100-6N 104.5,3.9 r0 top
IC2 "AG20P-5" DCDC_XPPOWER_AG0-2KV 87.8,41.5 r270 top
IC3 "AG20P-5" DCDC_XPPOWER_AG0-2KV 87.8,15.3 r270 top
IC4 "ADP7118AUJZ-R7" SOT95P280X90-5N 134.821,37.008 r180 top
IC5 "ADP5070AREZ" SOP65P640X120-21N-R305X425 139.4,15.4 r90 top
IC6 "ADP7118AUJZ-R7" SOT95P280X90-5N 119.6,9.8 r180 top
IC7 "ADP7182AUJZ-R7" SOT95P280X90-5N 119.6,15.2 r180 top
IC8 "LM45CIM3/NOPB" SOT95P251X112-3N 113.3,70.4 r90 top
IC9 "AD8676ARMZ" SOP65P490X110-8N 119.9,34 r270 top
IC10 "ADS1248IPWR" SOP65P640X120-28N 122.3,65.6 r270 top
IC11 "ADA4077-4ARZ" SOIC127P600X175-14N 102,67.2 r180 top
IC12 "LTC6655BHMS8-5" SOP65P490X110-8N 96.1,81.2 r180 top
IC13 "ADP7118AUJZ-R7" SOT95P280X90-5N 104.6,83.5 r180 top
IC14A "AD8676ARMZ" SOP65P490X110-8N 122.5,59.7 r180 top (schematic designator IC14)
IC14B "AD8676ARMZ" SOP65P490X110-8N 122.5,83.2 r180 top (schematic designator IC14)
IC15A "AD5791BRUZ" SOP65P640X120-20N 122.5,53.2 r0 top (schematic designator IC15)
IC15B "AD5791BRUZ" SOP65P640X120-20N 122.5,76.7 r0 top (schematic designator IC15)
IC16A "AD8675ARMZ" SOP65P490X110-8N 112.4,56.1 r180 top (schematic designator IC16)
IC16B "AD8675ARMZ" SOP65P490X110-8N 112.4,79.6 r180 top (schematic designator IC16)
IC17 "OPA207IDBVR" SOT95P280X145-5N 113.2,41.8 r90 top
IC18 "SN74LVC1G139DCUR" TSSOP50P310X90-8N 143,69.1 r180 top
IC19A "TLP3910(C20-TP,E" TOSHIBA_SOIC127P1000X220-6N 65,66 r180 top (schematic designator IC19)
IC19B "TLP3910(C20-TP,E" TOSHIBA_SOIC127P1000X220-6N 65,79.8 r180 top (schematic designator IC19)
IC20A "OPA2277U" SOIC127P600X175-8N 81.1,62.8 r90 top (schematic designator IC20)
IC20B "OPA2277U" SOIC127P600X175-8N 81.1,76.6 r90 top (schematic designator IC20)
IC21A "TLP3910(C20-TP,E" TOSHIBA_SOIC127P1000X220-6N 65,59.6 r180 top (schematic designator IC21)
IC21B "TLP3910(C20-TP,E" TOSHIBA_SOIC127P1000X220-6N 65,73.4 r180 top (schematic designator IC21)
IC22A "OPA207IDBVR" SOT95P280X145-5N 87.3,65.5 r180 top (schematic designator IC22)
IC22B "OPA207IDBVR" SOT95P280X145-5N 87.3,79.3 r180 top (schematic designator IC22)
J1 "SMD Pad" R400X300 12.5,72.3 r0 top locked
J2 "SMD Pad" R400X300 12.5,53.8 r0 top locked
J3 "SMD Pad" R400X300 12.5,35.1 r0 top locked
J4 "SMD Pad" R400X300 12.5,16.6 r0 top locked
J5 "2.00 mm_SMT_Vertical_16 pin" 62131621821 142.964,52.004 r90 top locked
L1 "4.7uH" IND_WURTH_WE-SPC-4838 103.8,8.9 r90 top
L2 "10uH" IND_BOURNS_PM43 99.8,15.2 r90 top
L3 "4.7uH" IND_WURTH_WE-SPC-4838 142.4,38.3 r270 top
L4 "15uH" IND_WURTH_WE-SPC-4838 135.8,7.5 r180 top
L5 "1.5uH" IND_COILCRAFT_XAL4020 126.4,8.8 r180 top
L6 "2.2uH" IND_MURATA_LQH44PN_P0 123.5,20.5 r270 top
L7 "0.68uH" IND_BOURNS_SRP3212 131.4,17.1 r90 top
L8 "470R@100MHz" INDC1608X95N 139.7,29.3 r0 top
P1 "100k" TRIM_BOURNS_3224X 111.8,36.8 r270 top
P2 "10k" TRIM_BOURNS_3224X 111.8,31.4 r270 top
P3 "10k" TRIM_BOURNS_3224X 111.8,26 r270 top
R1 "100k" RESC3216X50N 62.9,43.5 r270 top
R2 "100k" RESC3216X50N 62.9,35.5 r270 top
R3 "52k3" RESC1608X55N 108.8,3.7 r90 top
R4 "10k" RESC1005X40N 97.9,42.7 r270 top
R5 "10k" RESC1005X40N 107.3,3.3 r270 top
R6 "100k" RESC3216X50N 62.9,10.6 r90 top
R7 "100k" RESC3216X50N 62.9,18.6 r90 top
R8 "10k" RESC1005X40N 144.4,61.2 r180 top
R9 "1" RESC1005X40N 138.5,36.5 r270 top
R10 "31k6" RESC1005X35N 131,36.5 r270 top
R11 "10k" RESC1005X40N 131.6,38 r180 top
R12 "4R7" RESC1005X40N 126.4,5.6 r180 top
R13 "10k" RESC1005X40N 144.5,15.5 r0 top
R14 "22k" RESC1005X40N 144.06,11.9 r270 top
R15 "1" RESC1005X40N 122.8,7.8 r180 top
R16 "105k" RESC1608X55N 116.6,8.2 r270 top
R17 "10k" RESC1005X40N 142.3,63.1 r90 top
R18 "10k" RESC1005X40N 116.9,10.7 r90 top
R19 "30k1" RESC1005X40N 145.975,18.9 r90 top
R20 "63k4" RESC1608X55N 144.7,8.4 r270 top
R21 "52k3" RESC1608X55N 145,14 r0 top
R22 "3k57" RESC1608X55N 143.1,8.4 r90 top
R23 "10k" RESC1005X40N 142.3,65.1 r270 top
R24 "10k" RESC1005X40N 139.5,8.7 r270 top
R25 "10k" RESC1005X40N 140.5,8.7 r270 top
R26 "10k" RESC1005X40N 141.5,8.7 r270 top
R27 "2k8" RESC1608X55N 142,21.5 r90 top
R28 "54k9" RESC1608X55N 143.6,21.5 r90 top
R29 "1" RESC1005X40N 122.4,16.2 r270 top
R30 "105k" RESC1608X55N 116.6,15.3 r270 top
R31 "10" RESC1005X40N 120.5,20.5 r270 top
R32 "10k" RESC1005X40N 118.7,17.6 r180 top
R33 "68" RESC3216X65N 124,82 r0 bottom
R34 "68" RESC3216X65N 124,71.5 r0 bottom
R35 "68" RESC3216X65N 124,66.5 r0 bottom
R36 "68" RESC3216X65N 124,76 r0 bottom
R37 "68" RESC3216X65N 124,51.5 r0 bottom
R38 "68" RESC3216X65N 52,79 r0 bottom
R39 "68" RESC3216X65N 52,71 r0 bottom
R40 "68" RESC3216X65N 52,37.325 r0 bottom
R41 "68" RESC3216X65N 52,29.325 r0 bottom
R42 "68" RESC3216X65N 115,82 r0 bottom
R43 "68" RESC3216X65N 115,70 r0 bottom
R44 "68" RESC3216X65N 116.8,63 r0 bottom
R45 "68" RESC3216X65N 115,78 r0 bottom
R46 "68" RESC3216X65N 117.5,54 r0 bottom
R47 "68" RESC3216X65N 46,79 r0 bottom
R48 "68" RESC3216X65N 46,71 r0 bottom
R49 "68" RESC3216X65N 46,37.325 r0 bottom
R50 "68" RESC3216X65N 46,29.325 r0 bottom
R51 "10M" RESC2113X55N 113.9,46.6 r270 top
R52 "68" RESC3216X65N 108,82 r0 bottom
R53 "68" RESC3216X65N 109,70 r0 bottom
R54 "68" RESC3216X65N 111.3,63 r0 bottom
R55 "68" RESC3216X65N 108,78 r0 bottom
R56 "68" RESC3216X65N 111,54 r0 bottom
R57 "68" RESC3216X65N 40,79 r0 bottom
R58 "68" RESC3216X65N 40,71 r0 bottom
R59 "68" RESC3216X65N 40,37.325 r0 bottom
R60 "68" RESC3216X65N 40,29.325 r0 bottom
R61 "1k" RESC1005X40N 115.9,43.4 r0 top
R62 "100k" RESC1005X40N 115.9,44.4 r180 top
R63 "10k" RESC1005X40N 110.7,41 r90 top
R64 "75" RESC1005X40N 114.9,67.8 r0 top
R65 "68" RESC3216X65N 100,82 r0 bottom
R66 "68" RESC3216X65N 100.3,70 r0 bottom
R67 "68" RESC3216X65N 101,63 r0 bottom
R68 "68" RESC3216X65N 101,78 r0 bottom
R69 "68" RESC3216X65N 101,54.5 r0 bottom
R70 "68" RESC3216X65N 30,79 r0 bottom
R71 "68" RESC3216X65N 30,71 r0 bottom
R72 "68" RESC3216X65N 30,37.325 r0 bottom
R73 "68" RESC3216X65N 30,29.325 r0 bottom
R74 "68" RESC3216X65N 92,82 r0 bottom
R75 "68" RESC3216X65N 92,70 r0 bottom
R76 "68" RESC3216X65N 92,63 r0 bottom
R77 "68" RESC3216X65N 92,78 r0 bottom
R78 "68" RESC3216X65N 92,57 r0 bottom
R79 "68" RESC3216X65N 24,79 r0 bottom
R80 "68" RESC3216X65N 24,71 r0 bottom
R81 "68" RESC3216X65N 24,37.325 r0 bottom
R82 "68" RESC3216X65N 24,29.325 r0 bottom
R83 "7k5" RESC1005X40N 116.6,37.2 r180 top
R84 "68" RESC3216X65N 86,82 r0 bottom
R85 "68" RESC3216X65N 86,70 r0 bottom
R86 "68" RESC3216X65N 86,65.5 r0 bottom
R87 "68" RESC3216X65N 86,78.2 r0 bottom
R88 "68" RESC3216X65N 86,57 r0 bottom
R89 "68" RESC3216X65N 18,79 r0 bottom
R90 "68" RESC3216X65N 18,71 r0 bottom
R91 "68" RESC3216X65N 18,37.325 r0 bottom
R92 "68" RESC3216X65N 18,29.325 r0 bottom
R93 "4k7" RESC1005X40N 116.6,36.2 r0 top
R94 "100k" RESC1005X40N 131.4,66.1 r0 top
R95 "100k" RESC1005X40N 128.5,66.1 r0 top
R96 "100k" RESC1005X40N 128.5,67.1 r180 top
R97 "100k" RESC1005X40N 131.4,67.1 r180 top
R98 "0R1" RESC1608X55N 121.9,61.6 r180 bottom
R99 "0R1" RESC1608X55N 129.2,70.8 r180 top
R100 "47k" RESC2012X60N#1 101.4,83.5 r270 top
R101 "10k" RESC1005X40N 106.8,66 r180 top
R102 "10k" RESC1005X40N 99.8,84 r90 top
R103 "10k" RESC1005X40N 106.8,65 r180 top
R104 "0" RESC1005X40N 92.3,81.2 r270 top
R105 "10k" RESC1005X40N 99.8,80.1 r270 top
R106 "10k" RESC1005X40N 97.3,65.9 r0 top
R107 "10k" RESC1005X40N 97.3,64.9 r0 top
R108A "10k" RESC1005X40N 126.8,48.2 r270 top (schematic designator R108)
R108B "10k" RESC1005X40N 126.8,71.7 r270 top (schematic designator R108)
R109A "10k" RESC1005X40N 124.8,48.2 r270 top (schematic designator R109)
R109B "10k" RESC1005X40N 124.8,71.7 r270 top (schematic designator R109)
R110A "10k" RESC1005X40N 123.8,48.2 r270 top (schematic designator R110)
R110B "10k" RESC1005X40N 123.8,71.7 r270 top (schematic designator R110)
R111A "10k" RESC1005X40N 125.8,48.2 r270 top (schematic designator R111)
R111B "10k" RESC1005X40N 125.8,71.7 r270 top (schematic designator R111)
R112A "100" RESC2012X60N#2 44.5,30.8 r0 top (schematic designator R112)
R112B "100" RESC2012X60N#2 44.5,72.5 r0 top (schematic designator R112)
R113A "100" RESC2012X60N#2 29.5,41.3 r180 top (schematic designator R113)
R113B "100" RESC2012X60N#2 29.5,84 r180 top (schematic designator R113)
R114A "100k" RESC1005X40N 77.8,61.8 r90 top (schematic designator R114)
R114B "100k" RESC1005X40N 77.8,75.6 r90 top (schematic designator R114)
R115A "1k" RESC1005X40N 71.5,63.6 r180 top (schematic designator R115)
R115B "1k" RESC1005X40N 71.5,77.4 r180 top (schematic designator R115)
R116A "1k" RESC1005X40N 73.5,63.6 r0 top (schematic designator R116)
R116B "1k" RESC1005X40N 73.5,77.4 r0 top (schematic designator R116)
R117A "10k" RESC1005X40N 84.6,62.4 r90 top (schematic designator R117)
R117B "10k" RESC1005X40N 84.6,76.2 r90 top (schematic designator R117)
R118A "1K" RESC6331X70N 14.4,27.7 r270 top (schematic designator R118)
R118B "1K" RESC6331X70N 14.4,65.4 r270 top (schematic designator R118)
R119A "100" RESC2012X60N#2 44.2,16.7 r0 top (schematic designator R119)
R119B "100" RESC2012X60N#2 44.305,58.4 r0 top (schematic designator R119)
R120A "1k" RESC1005X40N 73.5,62 r180 top (schematic designator R120)
R120B "1k" RESC1005X40N 73.5,75.8 r180 top (schematic designator R120)
R121A "47k" RESC2012X60N#2 17.4,37.1 r180 top (schematic designator R121)
R121B "47k" RESC2012X60N#2 17.4,78.8 r180 top (schematic designator R121)
R122A "100" RESC2012X60N#2 44.2,5.7 r0 top (schematic designator R122)
R122B "100" RESC2012X60N#2 44.2,47.4 r0 top (schematic designator R122)
R123A "2k" RESC1005X40N 77.8,63.7 r270 top (schematic designator R123)
R123B "2k" RESC1005X40N 77.8,77.5 r270 top (schematic designator R123)
R124A "1k" RESC1005X40N 71.5,62 r0 top (schematic designator R124)
R124B "1k" RESC1005X40N 71.5,75.8 r0 top (schematic designator R124)
R125 "2M" RESC5025X65N 75.8,34.3 r90 top
R126 "2M" RESC5025X65N 75.8,40.8 r90 top
R127 "2M" RESC5025X65N 75.8,47.3 r90 top
R128 "2M" RESC5025X65N 75.8,6.8 r90 top
R129 "2M" RESC5025X65N 75.8,13.3 r90 top
R130 "2M" RESC5025X65N 75.8,19.8 r90 top
R131A "1k" RESC1005X40N 84.6,66.4 r90 top (schematic designator R131)
R131B "1k" RESC1005X40N 84.6,80.2 r90 top (schematic designator R131)
R132A "1k" RESC1005X40N 86.3,67.9 r180 top (schematic designator R132)
R132B "1k" RESC1005X40N 86.3,81.7 r180 top (schematic designator R132)
R133A "1k" RESC1005X40N 84.6,64.4 r270 top (schematic designator R133)
R133B "1k" RESC1005X40N 84.6,78.2 r270 top (schematic designator R133)
R134A "1k" RESC1005X40N 88.3,67.9 r0 top (schematic designator R134)
R134B "1k" RESC1005X40N 88.3,81.7 r0 top (schematic designator R134)
R135 "10M" RESC2113X55N 121.6,40.1 r270 top
R136 "10M" RESC2113X55N 123.5,29.7 r180 top
R137 "10k" RESC1005X40N 126.2,39.1 r180 top
R138 "10k" RESC1005X40N 117.1,26.9 r270 top
R139 "1k" RESC1005X40N 124.7,34.3 r180 top
R140 "100k" RESC1005X40N 122.8,34.3 r180 top
R141 "1k" RESC1005X40N 117.1,28.8 r90 top
R142 "100k" RESC1005X40N 118,30.2 r0 top
R143 "10k" RESC1005X40N 123.1,39.6 r90 top
R144 "10k" RESC1005X40N 123.9,26.2 r0 top
R145 "10k" RESC1005X40N 116.1,29.7 r270 top
R146 "10k" RESC1005X40N 116.1,24.2 r270 top
RN1 "10k" SOP65P490X110-9N-R168X188 102,60.6 r180 top
RN2 "10k" SOP65P490X110-9N-R168X188 102,73.8 r0 top
RN3A "19.98M 20k" RN_CADDOCK_HVD5_VERTICAL 35.2,41 r0 bottom (schematic designator RN3)
RN3B "19.98M 20k" RN_CADDOCK_HVD5_VERTICAL 35.2,82.675 r0 bottom locked (schematic designator RN3)
T1 "BSS138LT1G" SOT95P240X110-3N 99,39.6 r180 top
T2 "DMP2066LSN-7" SOT95P285X140-3N 144.8,64 r90 top
T3 "BSS138LT1G" SOT95P240X110-3N 140,64 r270 top
T4 "BSH103" SOT95P230X110-3N 104.4,83.8 r0 bottom
T5 "BSH103" SOT95P230X110-3N 104.3,70.7 r90 bottom
T6 "BSH103" SOT95P230X110-3N 107.2,62.5 r0 bottom
T7 "BSH103" SOT95P230X110-3N 104.9,74.9 r0 bottom
T8 "BSH103" SOT95P230X110-3N 105.8,54 r0 bottom
T9 "BSH103" SOT95P230X110-3N 35,79 r0 bottom
T10 "BSH103" SOT95P230X110-3N 35,71 r0 bottom
T11 "BSH103" SOT95P230X110-3N 35,37.325 r0 bottom
T12 "BSH103" SOT95P230X110-3N 35,29.325 r0 bottom
T13A "IXTT02N450HV" "IXYS_TO-268AA (D3Pak-HV)" 31.4,30.8 r0 top (schematic designator T13)
T13B "IXTT02N450HV" "IXYS_TO-268AA (D3Pak-HV)" 31.4,72.5 r0 top (schematic designator T13)
T14A "BC847B" SOT95P230X110-3N 72.5,66 r180 top (schematic designator T14)
T14B "BC847B" SOT95P230X110-3N 72.5,79.8 r180 top (schematic designator T14)
T15A "BC857B" SOT95P230X110-3N 72.5,59.6 r180 top (schematic designator T15)
T15B "BC857B" SOT95P230X110-3N 72.5,73.4 r180 top (schematic designator T15)
T16A "IXTT02N450HV" "IXYS_TO-268AA (D3Pak-HV)" 31.3,11.2 r180 top (schematic designator T16)
T16B "IXTT02N450HV" "IXYS_TO-268AA (D3Pak-HV)" 31.3,52.9 r180 top (schematic designator T16)
TP2 "Test Point" TPS127 116.3,70.7 r90 top
TP3 "Test Point" TPS127 109.1,40.5 r180 top

## Footprints (in the part's own frame and the unit in brackets; to place one, negate y for a bottom-side part, rotate by r counter-clockwise, add the part's x,y. Pads: shape width x height; smd on the part's side, far side on the other; paste and mask are expansions set on the pad)
62131621821 [mm] "Socket Header, Pitch 2.00 mm, SMT, Vertical, dual row, 16p"
  rect 0.89x1.65 smd: 1(-7,-2.575) 2(-7,2.575) 3(-5,-2.575) 4(-5,2.575) 5(-3,-2.575) 6(-3,2.575) 7(-1,-2.575) 8(-1,2.575) 9(1,-2.575) 10(1,2.575) 11(3,-2.575) 12(3,2.575) 13(5,-2.575) 14(5,2.575) 15(7,-2.575) 16(7,2.575)
  round 1 hole 1 unplated: M1(-7,-1) M2(-7,1) M3(-5,-1) M4(-5,1) M5(-3,-1) M6(-3,1) M7(-1,-1) M8(-1,1) M9(1,-1) M10(1,1) M11(3,-1) M12(3,1) M13(5,-1) M14(5,1) M15(7,-1) M16(7,1)
  silkscreen extent -8,-2 8,2, body extent -8,-3 8,3, height 2.95
c150h80 [mm] "Plated Through Hole: Hole Dia.=0.8mm Pad Dia.=1.50mm, , IPC-7251 Level A"
  round 1.5 hole 0.8: 1(0,0)
  silkscreen extent -1.1,-1.1 1.1,1.1
CAPC1005X55N [mm] "Capacitor, Non-Polarized, Chip; 1.00mm L X 0.50mm W X 0.70mm H, IPC Medium Density"
  rect 0.62x0.62 smd: 1(-0.45,0) 2(0.45,0)
  body extent -0.52,-0.27 0.53,0.28, height 0.55
CAPC1608X80N [mm] "Chip Capacitor, Body 1.6x0.8mm IPC Medium Density"
  rect 1x1 smd: 1(-0.75,0) 2(0.75,0)
  body extent -0.87,-0.47 0.88,0.48, height 0.8
CAPC1608X87N#1 [mm] "Chip Capacitor, Body 1.6x0.8mm IPC Medium Density"
  rect 0.95x1 smd: 1(-0.8,0) 2(0.8,0)
  body extent -0.87,-0.47 0.88,0.48, height 0.87
CAPC1608X87N#2 [mm] "Chip Capacitor, Body 1.6x0.8mm IPC Medium Density"
  rrect50% 0.95x1 smd: 1(-0.8,0) 2(0.8,0)
  body extent -0.87,-0.47 0.88,0.48, height 0.87
CAPC2012X135N [mm] "Chip Capacitor, Body 2.0x1.25mm, IPC Medium Density"
  rect 1.05x1.4 smd: 1(-0.9,0) 2(0.9,0)
  silkscreen extent 0,-0.58 0,0.58, body extent -1.05,-0.67 1.05,0.68, height 1.25
CAPC2012X145N [mm] "Chip Capacitor, Body 2.0x1.45mm, IPC Medium Density"
  rect 1.15x1.45 smd: 1(-0.9,0) 2(0.9,0)
  silkscreen extent 0,-0.58 0,0.58, body extent -1.05,-0.67 1.05,0.68, height 1.45
CAPC2013X145N [mm] "Capacitor, Non-Polarized, Chip; 2.00mm L X 1.25mm W X 1.45mm H, IPC Medium Density"
  rect 1.15x1.45 smd: 1(-0.9,0) 2(0.9,0)
  silkscreen extent 0,-0.63 0,0.63, body extent -1.1,-0.72 1.1,0.73, height 1.45
CAPC3216X180N [mm] "Chip Capacitor, Body 3.2x1.6mm, IPC Medium Density"
  rect 1.15x1.8 smd: 1(-1.5,0) 2(1.5,0)
  silkscreen extent -0.55,-0.8 0.55,0.8, body extent -1.7,-0.9 1.7,0.9, height 1.8
CAPC5764X279N [mm] "Capacitor, Non-Polarized, Chip; 5.72mm L X 6.35mm W X 2.794mm H, IPC Medium Density"
  rrect50% 1.4x6.6 smd: 1(-2.65,0) 2(2.65,0)
  silkscreen extent -1.6,-3.2 1.6,3.2, body extent -2.98,-3.17 2.99,3.18, height 2.79
CAPMP3216X180N [mm] "Capacitor, Polarized, Molded  Body 3.2x1.6mm, IPC Medium Density"
  rect 1.8x1.25 smd: 1(-1.3,0) 2(1.3,0)
  silkscreen extent -2.4,-0.7 0,1.18, body extent -1.7,-0.9 1.7,0.9, height 1.6
CAPMP3528X210N [mm] "Capacitor, Polarized, Molded  Body 3.5x2.8mm, IPC Medium Density"
  rect 1.8x2.25 smd: 1(-1.45,0) 2(1.45,0)
  silkscreen extent -2.52,-1.5 1.85,1.72, body extent -1.85,-1.5 1.85,1.5, height 2.1
CAPMP7343X310N [mm] "Capacitor, Polarized, Molded  Body 7.3x4.3mm, IPC Medium Density"
  rect 2.35x2.45 smd: 1(-3.1,0) 2(3.1,0)
  silkscreen extent -4.42,-2.3 3.8,2.3, body extent -3.8,-2.3 3.8,2.3, height 3.1
DCDC_XPPOWER_AG0-2KV [mm] "AG Series, DC/HVDC Converter, Body W 11.43mm x L 23.37mm x H 6.35mm"
  rect 2.74x2.11 smd: 1(-9.779,7.402) 2(-4.699,7.402) 5(1.905,7.402)
  rrect50% 2.74x2.11 smd: 3(-8.255,-7.402) 4(1.905,-7.402)
  Keep-Out Layer board cut-out: -11.987,4.925 -11.905,5.341 -11.669,5.694 -11.316,5.93 -10.9,6.013 -10.9,6.013 -10.903,6.01 5.962,6.01 5.966,6.013 8.575,5.417 10.668,3.748 11.83,1.336 11.83,-1.341 10.668,-3.753 8.575,-5.422 5.966,-6.017 5.966,-6.017 -10.9,-6.017 -10.897,-6.02 -11.313,-5.937 -11.666,-5.701 -11.901,-5.349 -11.984,-4.932 -11.984,-4.932 -11.987,-4.93
  Keep-Out Layer lines w0.127: -10.897,-6.02 cw(c-10.897,-4.932) -11.984,-4.932 ; -10.9,-6.017 5.966,-6.017 ccw(c5.966,-0.002) 5.966,6.013 -10.9,6.013 ccw(c-10.9,4.925) -11.987,4.925 -11.987,-4.93
  silkscreen extent -11.43,-8.76 3.81,9.55, body extent -11.68,-8.76 11.68,8.76, height 3.3
DIOM5226X220N#1 [mm] "DO-214-AC/SMA Diode, Molded Body; 5.21mm L X 2.60mm W X 2.20mm H, IPC Medium Density"
  rect 2.3x1.55 smd: 1(-2.15,0) 2(2.15,0)
  silkscreen extent -3.52,-1.3 2.6,1.45, body extent -2.6,-1.3 2.6,1.3, height 2.2
DIOM5226X220N#2 [mm] "DO-214-AC/SMA Diode, Molded Body; 5.21mm L X 2.60mm W X 2.20mm H, IPC Medium Density"
  rrect50% 2.3x1.55 smd: 1(-2.15,0) 2(2.15,0)
  silkscreen extent -3.52,-1.3 2.6,1.45, body extent -2.6,-1.3 2.6,1.3, height 2.2
FIDUCIAL_TOP_S100-200 [mm] "Square Fiducial Target, Top Layer, 1.0mm, Top Solder 2.0mm, Keepout =2.0mm"
  rect 1x1 smd rot 45 paste-0.51 mask+0.5: 1(0,0)
  Layer 1 keep-out region: 1.414,0 0,-1.414 -1.414,0 0,1.414
IND_BOURNS_PM43 [mm] "SMD Inductor  Body Width 4.5mm Body Lenght 4mm Height 3.5mm"
  rect 1.8x4.5 smd: 1(-1.65,0) 2(1.65,0)
  silkscreen extent -0.45,-2.15 0.45,2.15, body extent -2.38,-2.15 2.38,2.15, height 3.5
IND_BOURNS_SRP3212 [mm] "SMD Inductor Body Width 2.5mm Body Lenght 3.2mm Height 1.2mm"
  rect 1.25x2.8 smd: 1(-1.225,0) 2(1.225,0)
  silkscreen extent -0.25,-1.25 0.25,1.25, body extent -1.6,-1.25 1.6,1.25, height 1.2
IND_COILCRAFT_XAL4020 [mm] "SMD Inductor, Width 4.3mm X Lenght 4.3mm X Height 2.1mm Body, XAL4020 Series"
  rect 0.98x3.4 smd: 1(-1.185,0) 2(1.185,0)
  silkscreen extent -2.15,-2.15 2.15,2.15, body extent -2.15,-2.15 2.15,2.15, height 2.1
IND_MURATA_LQH44PN_P0 [mm] "Wire Wound Ferrite Inductor for Power Lines, 4mm L X 4mm W X 1.65mm H, MURATA LQH44PN_P0 Series"
  rect 1.55x3 smd: 1(-1.425,0) 2(1.425,0)
  silkscreen extent -2,-2 2,2, body extent -2,-2 2,2, height 1.65
IND_WURTH_WE-SPC-4838 [mm] "SMD Inductor, Body 4.8x4.8mm"
  rect 2x5.3 smd: 1(-1.75,0) 2(1.75,0)
  silkscreen extent -0.4,-2.41 0.4,2.41, body extent -2.41,-2.41 2.41,2.41, height 3.81
INDC1608X95N [mm] "Chip Inductor, 2-Leads, EIA 0603, Metric 1608, Body 1.6x0.8mm, IPC Medium Density"
  rect 0.95x1 smd: 1(-0.8,0) 2(0.8,0)
  body extent -0.87,-0.47 0.88,0.48, height 0.95
"IXYS_TO-268AA (D3Pak-HV)" [mm] "IXYS D3Pak-HV TO-268AA TO, 5.45mm Pitch; 2 Pin,18.90mm L X 14.975mm W X 5.10mm H Body"
  rrect50% 3x2.5 smd: 1(-9,5.5) 2(-9,-5.5)
  rrect50% 13x17 smd: 3(4,0)
  silkscreen extent -5.6,-8.03 -2.85,8.03, body extent -9.7,-8.02 9.7,8.03, height 5.1
MTG270_500 [mm] "Plated Through Hole: Hole Dia.=2.7mm Pad Dia.=5.0mm"
  round 5 hole 2.7: 1(0,0)
R400X300 [mm] "4mm x  3mm SMD Pad"
  rrect50% 4x3 smd paste-1.5: 1(0,0)
RESC1005X35N [mm] "Chip Resistor, EIA 0402, Metric 1005, Body 1.0x0.5mm, IPC Medium Density"
  rect 0.58x0.62 smd: 1(-0.47,0) 2(0.47,0)
  body extent -0.52,-0.27 0.53,0.28, height 0.35
RESC1005X40N [mm] "Chip Resistor, EIA 0402, Metric 1005, Body 1.0x0.5mm, IPC Medium Density"
  rect 0.58x0.62 smd: 1(-0.47,0) 2(0.47,0)
  body extent -0.52,-0.27 0.53,0.28, height 0.4
RESC1608X55N [mm] "Chip Resistor, EIA 0603, Metric 1608, Body 1.6x0.8mm, IPC Medium Density"
  rect 0.9x1 smd: 1(-0.8,0) 2(0.8,0)
  body extent -0.87,-0.47 0.88,0.48, height 0.55
RESC2012X60N#1 [mm] "Chip Resistor, EIA 0805, Metric 2012, Body 2.0x1.2mm, IPC Medium Density"
  rect 0.95x1.4 smd: 1(-1,0) 2(1,0)
  silkscreen extent 0,-0.55 0,0.55, body extent -1.1,-0.67 1.1,0.68, height 0.6
RESC2012X60N#2 [mm] "Chip Resistor, EIA 0805, Metric 2012, Body 2.0x1.2mm, IPC Medium Density"
  rrect50% 0.95x1.4 smd: 1(-1,0) 2(1,0)
  silkscreen extent 0,-0.55 0,0.55, body extent -1.1,-0.67 1.1,0.68, height 0.6
RESC2113X55N [mm] "Chip Resistor, EIA 0805, Metric 2113, Body 2.05x1.3mm, IPC Medium Density"
  rect 1x1.45 smd: 1(-0.95,0) 2(0.95,0)
  silkscreen extent 0,-0.55 0,0.55, body extent -1,-0.62 1,0.63, height 0.55
RESC3216X50N [mm] "Chip Resistor, EIA 1206, Metric 3216, Body 3.2x1.6mm, IPC Medium Density"
  rrect50% 1.05x1.75 smd: 1(-1.5,0) 2(1.5,0)
  silkscreen extent -0.6,-0.8 0.6,0.8, body extent -1.67,-0.87 1.68,0.88, height 0.51
RESC3216X65N [mm] "Chip Resistor, EIA 1206, Metric 3216, Body 3.2x1.6mm, IPC Medium Density"
  rect 1.15x1.8 smd: 1(-1.45,0) 2(1.45,0)
  silkscreen extent -0.5,-0.9 0.5,0.9, body extent -1.67,-0.87 1.68,0.88, height 0.65
RESC5025X65N [mm] "Resistor, Chip; 5mm L X 2.5mm W X 0.65mm H, IPC Medium Density"
  rrect50% 1.15x2.7 smd: 1(-2.35,0) 2(2.35,0)
  silkscreen extent -1.4,-1.25 1.4,1.25, body extent -2.55,-1.32 2.55,1.33, height 0.65
RESC6331X70N [mm] "Chip Resistor, EIA 2512, Metric 6331, 2-Leads, Body 6.3x3.1mm, IPC Medium Density"
  rrect50% 1.05x3.3 smd: 1(-3.1,0) 2(3.1,0)
  silkscreen extent -2.2,-1.65 2.2,1.65, body extent -3.25,-1.65 3.25,1.65, height 0.7
RN_CADDOCK_HVD5_VERTICAL [mm]
  round 1.6 hole 0.9: 1(-17.78,0) 2(-15.24,0) 3(-12.7,0) 4(10.16,0) 5(12.7,0) 6(17.78,0)
  silkscreen extent -19.05,-2.04 19.05,0.75, body extent -19.05,-6.5 19.05,16.37, height 5.05
SOD3715X135N [mm] "SOD Diode (SOD-123); 2.70mm W X 1.55mm L X 1.35mm H body, IPC Medium Density"
  rect 1x0.75 smd: 1(-1.8,0) 2(1.8,0)
  silkscreen extent -2.17,-0.8 1.35,1.02, body extent -1.92,-0.85 1.93,0.85, height 1.35
SOIC127P600X175-8N [mm] "SOIC 8, Pitch 1.27mm - Body 4x5mm, IPC Medium Density"
  rect 1.55x0.6 smd: 1(-2.7,1.905) 2(-2.7,0.635) 3(-2.7,-0.635) 4(-2.7,-1.905) 5(2.7,-1.905) 6(2.7,-0.635) 7(2.7,0.635) 8(2.7,1.905)
  silkscreen extent -2.52,-2.5 1.55,2.77, body extent -3.1,-2.5 3.1,2.5, height 1.75
SOIC127P600X175-14N [mm] "SOIC 14, Pitch 1.27mm - Body 4x8.75mm, IPC Medium Density"
  rect 1.55x0.6 smd: 1(-2.7,3.81) 2(-2.7,2.54) 3(-2.7,1.27) 4(-2.7,0) 5(-2.7,-1.27) 6(-2.7,-2.54) 7(-2.7,-3.81) 8(2.7,-3.81) 9(2.7,-2.54) 10(2.7,-1.27) 11(2.7,0) 12(2.7,1.27) 13(2.7,2.54) 14(2.7,3.81)
  silkscreen extent -2.53,-4.4 1.55,4.78, body extent -3.1,-4.37 3.1,4.38, height 1.75
SOP65P490X110-8N [mm] "SOP, 0.65mm pitch; 8 pin, 3.00mm W X 3.00mm L X 1.10mm H body, IPC Medium Density"
  rect 1.5x0.45 smd: 1(-2.2,0.975) 2(-2.2,0.325) 3(-2.2,-0.325) 4(-2.2,-0.975) 5(2.2,-0.975) 6(2.2,-0.325) 7(2.2,0.325) 8(2.2,0.975)
  silkscreen extent -2.82,-1.5 1.12,1.83, body extent -2.45,-1.55 2.45,1.55, height 1.1
SOP65P490X110-9N-R168X188 [mm] "SOP, 0.65mm Pitch; 8 Pin, 3.00mm W X 3.00mm L X 1.10mm H body, (w/Thermal Tab 1.68X 1.88mm), IPC Medium Density"
  rect 1.4x0.45 smd: 1(-2.2,0.975) 2(-2.2,0.325) 3(-2.2,-0.325) 4(-2.2,-0.975) 5(2.2,-0.975) 6(2.2,-0.325) 7(2.2,0.325) 8(2.2,0.975)
  rect 1.65x1.85 smd: 9(0,0)
  silkscreen extent -2.78,-1.5 1.15,1.82, body extent -2.45,-1.55 2.45,1.55, height 1.1
SOP65P640X120-20N [mm] "SOP, 20-Leads, Body 6.5x4.4mm, Pitch 0.65mm, IPC Medium Density"
  rect 1.5x0.45 smd: 1(-2.9,2.925) 2(-2.9,2.275) 3(-2.9,1.625) 4(-2.9,0.975) 5(-2.9,0.325) 6(-2.9,-0.325) 7(-2.9,-0.975) 8(-2.9,-1.625) 9(-2.9,-2.275) 10(-2.9,-2.925) 11(2.9,-2.925) 12(2.9,-2.275) 13(2.9,-1.625) 14(2.9,-0.975) 15(2.9,-0.325) 16(2.9,0.325) 17(2.9,0.975) 18(2.9,1.625) 19(2.9,2.275) 20(2.9,2.925)
  silkscreen extent -3.52,-3.25 1.83,3.77, body extent -3.12,-3.3 3.12,3.3, height 1.2
SOP65P640X120-21N-R305X425 [mm] "SOP, 0.65mm Pitch; 20 Pin, 4.40mm W X 6.50mm L X 1.20mm H Body (w/Thermal Tab 3.05mm X 4.25mm), IPC Medium Density"
  rect 1.5x0.45 smd: 1(-2.9,2.925) 2(-2.9,2.275) 3(-2.9,1.625) 4(-2.9,0.975) 5(-2.9,0.325) 6(-2.9,-0.325) 7(-2.9,-0.975) 8(-2.9,-1.625) 9(-2.9,-2.275) 10(-2.9,-2.925) 11(2.9,-2.925) 12(2.9,-2.275) 13(2.9,-1.625) 14(2.9,-0.975) 15(2.9,-0.325) 16(2.9,0.325) 17(2.9,0.975) 18(2.9,1.625) 19(2.9,2.275) 20(2.9,2.925)
  rect 3.05x4.25 smd: 21(0,0)
  silkscreen extent -3.52,-3.25 1.8,3.77, body extent -3.12,-3.3 3.12,3.3, height 1.2
SOP65P640X120-28N [mm] "SOP, 0.65mm Pitch; 28 Pin, 4.40mm W X 9.70mm L X 1.20mm H body, IPC Medium Density"
  rect 1.5x0.45 smd: 1(-2.9,4.225) 2(-2.9,3.575) 3(-2.9,2.925) 4(-2.9,2.275) 5(-2.9,1.625) 6(-2.9,0.975) 7(-2.9,0.325) 8(-2.9,-0.325) 9(-2.9,-0.975) 10(-2.9,-1.625) 11(-2.9,-2.275) 12(-2.9,-2.925) 13(-2.9,-3.575) 14(-2.9,-4.225) 15(2.9,-4.225) 16(2.9,-3.575) 17(2.9,-2.925) 18(2.9,-2.275) 19(2.9,-1.625) 20(2.9,-0.975) 21(2.9,-0.325) 22(2.9,0.325) 23(2.9,0.975) 24(2.9,1.625) 25(2.9,2.275) 26(2.9,2.925) 27(2.9,3.575) 28(2.9,4.225)
  silkscreen extent -3.52,-4.85 1.83,5.08, body extent -3.12,-4.9 3.12,4.9, height 1.2
SOT95P230X110-3N [mm] "SOT23, 3 pin, Pitch 0.95mm - 1.3mm W X 2.9mm L X 1.1mm H, IPC Medium Density"
  rect 1x0.6 smd: 1(-1.15,0.95) 2(-1.15,-0.95) 3(1.15,0)
  silkscreen extent -1.52,-1.45 0.33,1.87, body extent -1.08,-1.5 1.25,1.5, height 1.1
SOT95P240X110-3N [mm] "SOT23 3-Leads, Pitch 0.95mm, Body 1.3x2.9mm, IPC Medium Density"
  rect 1.05x0.65 smd: 1(-1.15,0.95) 2(-1.15,-0.95) 3(1.15,0)
  silkscreen extent -1.53,-1.45 0.3,1.92, body extent -1.25,-1.5 1.25,1.5, height 1.1
SOT95P251X112-3N [mm] "SOT23 3-Leads, Pitch 0.95mm - Body 1.3x2.9mm, IPC Medium Density"
  rect 1.05x0.65 smd: 1(-1.2,0.95) 2(-1.2,-0.95) 3(1.2,0)
  silkscreen extent -1.57,-1.45 0.35,1.88, body extent -1.27,-1.5 1.27,1.5, height 1.12
SOT95P275X140-3N [mm] "SOT, 0.95mm Pitch; 3 Pin, 1.60mm W X 2.975mm L X 1.40mm H Body, IPC Medium Density"
  rect 1.1x0.6 smd: 1(-1.3,0.95) 2(-1.3,-0.95) 3(1.3,0)
  silkscreen extent -1.72,-1.5 0.43,1.87, body extent -1.35,-1.45 1.35,1.45, height 1.4
SOT95P280X90-5N [mm] "SOT, 0.95mm Pitch; 5 Pin, 1.60mm W X 2.90mm L X 0.90mm H body, IPC Medium"
  rect 1.05x0.6 smd: 1(-1.3,0.95) 2(-1.3,0) 3(-1.3,-0.95) 4(1.3,-0.95) 5(1.3,0.95)
  silkscreen extent -1.68,-1.45 0.45,1.87, body extent -1.4,-1.5 1.4,1.5, height 0.9
SOT95P280X100-6N [mm] "SOT23, 0.95mm pitch; 6 pin, 1.625mm W X 2.90mm L X 1.00mm H body, IPC Medium Density"
  rect 1.1x0.55 smd: 1(-1.35,0.95) 2(-1.35,0) 3(-1.35,-0.95) 4(1.35,-0.95) 5(1.35,0) 6(1.35,0.95)
  silkscreen extent -1.77,-1.45 0.48,1.87, body extent -1.4,-1.5 1.4,1.5, height 1
SOT95P280X145-5N [mm] "SOT, 0.95mm pitch; 5 pin, 1.60mm W X 2.90mm L X 1.45mm H body, IPC Medium Density"
  rect 1.1x0.6 smd: 1(-1.3,0.95) 2(-1.3,0) 3(-1.3,-0.95) 4(1.3,-0.95) 5(1.3,0.95)
  silkscreen extent -1.72,-1.45 0.43,1.87, body extent -1.4,-1.5 1.4,1.5, height 1.45
SOT95P285X140-3N [mm] "SOT23, 0.95mm Pitch; 3 Pin, 1.6mm W X 3mm L X 1.4mm H Body, IPC Medium Density"
  rect 1.1x0.6 smd: 1(-1.3,0.95) 2(-1.3,-0.95) 3(1.3,0)
  silkscreen extent -1.72,-1.5 0.43,1.87, body extent -1.4,-1.5 1.4,1.5, height 1.4
TOSHIBA_SOIC127P1000X220-6N [mm] "TOSHIBA Case, SOIC, 1.27mm Pitch; 6  Pin, 7.5mm W X 3.84mm"
  rect 1.3x0.8 smd: 1(-4.75,1.27) 2(-4.75,0) 3(-4.75,-1.27)
  rrect50% 1.3x0.8 smd: 4(4.75,-1.27) 5(4.75,0) 6(4.75,1.27)
  silkscreen extent -3.75,-1.92 3.75,1.92, body extent -5,-1.92 5,1.92, height 2.2
TPS127 [mm] "1.27 x  1.27mm SMD Test Point Area"
  rect 1.27x1.27 smd paste-1.27: 1(0,0)
  silkscreen extent -0.94,-0.94 0.94,0.94
TRIM_BOURNS_3224X [mm] "Bourns 3224X Trimming Potentiometer"
  rect 1.32x1.9 smd: 1(-1.27,-2.55) 3(1.27,-2.55)
  rect 2x1.9 smd: 2(0,2.55)
  silkscreen extent -2.4,-1.75 2.4,1.75, body extent -2.4,-2.85 2.4,2.85, height 5.3
TSSOP50P310X90-8N [mm] "TSSOP, 8-Leads, Body 2.00x2.30mm, Pitch 0.50mm, IPC Medium Density"
  oval 0.8x0.3 smd: 1(-1.6,0.75) 2(-1.6,0.25) 3(-1.6,-0.25) 4(-1.6,-0.75) 5(1.6,-0.75) 6(1.6,-0.25) 7(1.6,0.25) 8(1.6,0.75)
  silkscreen extent -1.73,-1.05 0.8,1.57, body extent -1.55,-1.05 1.55,1.05, height 0.9

## Part data
B1 B2 B3 B4: library part PLATED_HOLE2.7_PAD5.0, "Single Terminal Socket", Author="CERN DEM JMW", Component Type="Standard (No BOM)", ComponentHeight=0mm, CreateDate=27.09.2011, Family="Plated Hole", HelpURL=Undefined, LatestRevisionDate=27.09.2011, Mounted=No, PackageDescription="Plated Through Hole: Hole Dia.=2.7mm Pad Dia.=5.0mm", Part Description="Plated Through Hole: Hole Dia.=2.7mm Pad Dia.=5.0mm", Part Number=PLATED_HOLE2.7_PAD5.0, Pin Count=1, Sense=No, SMD=No, Socket=No, Status=None
B5 B6 B7 B8: library part PLATED_HOLE0.8_PAD1.5, "Single Terminal Socket", Author="CERN DEM JLC", Component Type="Standard (No BOM)", ComponentHeight=0mm, CreateDate=5/11/2017, Family="Plated Hole", HelpURL=Undefined, LatestRevisionDate=5/11/2017, Mounted=No, PackageDescription="Plated Through Hole: Hole Dia.=0.8mm Pad Dia.=1.3mm, IPC-7251 Level A", Part Description="Plated Through Hole: Hole Dia.=0.8mm Pad Dia.=1.5mm, IPC-7251 Level A", Part Number=PLATED_HOLE0.8_PAD1.5, Pin Count=1, Sense=No, SMD=No, Socket=No, Status=None
C1 C39 C43 C48 C49 C52 C57 C61 C66A C66B C67A C67B C69A C69B C70A C70B C75A C75B C77A C77B C78A C78B C79A C79B C80A C80B C82 C84A C84B C86A C86B C88A C88B C89A C89B C90A C90B C97 C98 C101: library part CC0402_100NF_50V_10%_X7R, "Non-polarised capacitor", Case=0402, Manufacturer=GENERIC, Manufacturer1 ComponentHeight=0.55mm, Manufacturer1 Example=MURATA, Manufacturer1 Part Number=GRM155R71H104KE14D, Tolerance=±10%, Voltage=50V, Author="CERN DEM MR", Component Type=Standard, CreateDate=6/30/2017, HelpURL=\\cern.ch\dfs\Applications\Altium\Datasheets\CC0402_MURATA_GRM155R71H104KE14D.pdf, LatestRevisionDate=6/30/2017, Manufacturer Part Number=CC0402_100NF_50V_10%_X7R, Mounted=Yes, Part Description="SMD Multilayer Chip Ceramic Capacitor", Part Number=CC0402_100NF_50V_10%_X7R, Pin Count=2, Sense=No, SMD=Yes, Socket=No, Status=None, TC=X7R
C2 C15: library part CTE3528-21_22UF_20V_10%, "Polarised capacitor", Case=B, Manufacturer=GENERIC, Manufacturer1 ComponentHeight=2.1mm, Manufacturer1 Example=AVX, Manufacturer1 Part Number=TAJB226K020R, Tolerance=±10%, Voltage=20V, Author="CERN DEM JLC", Component Type=Standard, CreateDate=12/3/2007, HelpURL=\\cern.ch\dfs\Applications\Altium\Datasheets\CTE_AVX_TAJ.pdf, LatestRevisionDate=12/3/2007, Manufacturer Part Number=CTE3528-21_22UF_20V_10%, Mounted=Yes, Part Description="Solid Tantalum Chip Capacitor", Part Number=CTE3528-21_22UF_20V_10%, Pin Count=2, Sense=No, SMD=Yes, Socket=No, Status=Preferred
C3 C4 C5 C12 C13 C14: library part CC2225_22NF_2.5KV_10%_X7R, "Non-polarised capacitor", Case=2225, Manufacturer=GENERIC, Manufacturer1 ComponentHeight=2.79mm, Manufacturer1 Example=AVX, Manufacturer1 Part Number=2225WC223KAT1A, Tolerance=±10%, Voltage=2.5KV, Author="CERN DEM JLC", Component Type=Standard, CreateDate=10/21/2014, HelpURL=\\cern.ch\dfs\Applications\Altium\Datasheets\CC2225_X7R_AVX_HV-MLC.pdf, LatestRevisionDate=4/1/2015, Manufacturer Part Number=CC2225_22NF_2.5KV_10%_X7R, Mounted=Yes, Part Description="High Voltage MLC Chip Capacitor", Part Number=CC2225_22NF_2.5KV_10%_X7R, Pin Count=2, Sense=No, SMD=Yes, Socket=No, Status=None, TC=X7R
C6 C7 C21 C22 C56: library part CC0805_4.7UF_50V_10%_X7R, "Non-polarised capacitor", Case=0805, Manufacturer=GENERIC, Manufacturer1 ComponentHeight=1.45mm, Manufacturer1 Example=TDK, Manufacturer1 Part Number=C2012X7R1H475K125, Tolerance=±10%, Voltage=50V, Author="CERN DEM JMW", Component Type=Standard, CreateDate=7/30/2021, HelpURL=\\cern.ch\dfs\Applications\Altium\Datasheets\CC0805_X7R_TDK_C.pdf, LatestRevisionDate=7/30/2021, Manufacturer Part Number=CC0805_4.7UF_50V_10%_X7R, Mounted=Yes, Part Description="SMD Multilayer Chip Ceramic Capacitor", Part Number=CC0805_4.7UF_50V_10%_X7R, Pin Count=2, Sense=No, SMD=Yes, Socket=No, Status=Preferred, TC=X7R
C8 C11 C16 C29 C47 C50: library part CC1206_22UF_25V_20%_X5R, "Non-polarised capacitor", Case=1206, Manufacturer=GENERIC, Manufacturer1 ComponentHeight=1.8mm, Manufacturer1 Example=TDK, Manufacturer1 Part Number=C3216X5R1E226M160, Tolerance=±20%, Voltage=25V, Author="CERN DEM WB", Component Type=Standard, CreateDate=7/25/2018, HelpURL=\\cern.ch\dfs\Applications\Altium\Datasheets\CC1206_X5R_TDK_C.pdf, LatestRevisionDate=7/25/2018, Manufacturer Part Number=CC1206_22UF_25V_20%_X5R, Mounted=Yes, Part Description="SMD Multilayer Chip Ceramic Capacitor", Part Number=CC1206_22UF_25V_20%_X5R, Pin Count=2, Sense=No, SMD=Yes, Socket=No, Status=None, TC=X5R
C9 C10 C38 C91 C92: library part CC0805_22UF_16V_10%_X5R, "Non-polarised capacitor", Case=0805, Manufacturer=GENERIC, Manufacturer1 ComponentHeight=1.35mm, Manufacturer1 Example=TDK, Manufacturer1 Part Number=C2012X5R1C226KT, Tolerance=±10%, Voltage=16V, Author="CERN DEM JLC", Component Type=Standard, HelpURL=\\cern.ch\dfs\Applications\Altium\Datasheets\CC0805_X5R_TDK_C.pdf, Manufacturer Part Number=CC0805_22UF_16V_10%_X5R, Mounted=Yes, Part Description="SMD Multilayer Chip Ceramic Capacitor", Part Number=CC0805_22UF_16V_10%_X5R, Pin Count=2, Sense=No, SMD=Yes, Socket=No, Status=Preferred, TC=X5R
  C9 C10: CreateDate=10/25/2012, LatestRevisionDate=10/25/2012
  C38 C91 C92: CreateDate=25.10.2012, LatestRevisionDate=25.10.2012
C17 C18 C23 C25 C30 C33: library part CC0402_2.2UF_16V_10%_X5R, "Non-polarised capacitor", Case=0402, Manufacturer=GENERIC, Manufacturer1 ComponentHeight=0.55mm, Manufacturer1 Example=TDK, Manufacturer1 Part Number=C1005X5R1C225K050, Tolerance=±10%, Voltage=16V, Author="CERN DEM BC", Component Type=Standard, CreateDate=2/8/2021, HelpURL=\\cern.ch\dfs\Applications\Altium\Datasheets\CC0402_X5R_TDK_C.pdf, LatestRevisionDate=2/8/2021, Manufacturer Part Number=CC0402_2.2UF_16V_10%_X5R, Mounted=Yes, Part Description="SMD Multilayer Chip Ceramic Capacitor", Part Number=CC0402_2.2UF_16V_10%_X5R, Pin Count=2, Sense=No, SMD=Yes, Socket=No, Status=Preferred, TC=X5R